# Altium PCB PCB-NW0101 Rev.B.PcbDoc (part 1 of 3)
Units mil, origin at the board's own origin, x right, y up, seen from the top; angles counter-clockwise.
Board outline 787.4 x 1377.95 mil, 6 copper layers (Top, GND, Inner3, Inner4, PWR, Bottom), stack 29.136 mil thick; 118 components, 126 nets, 559 pads, 474 vias.
Unrouted connection lines stored in the file: 214.
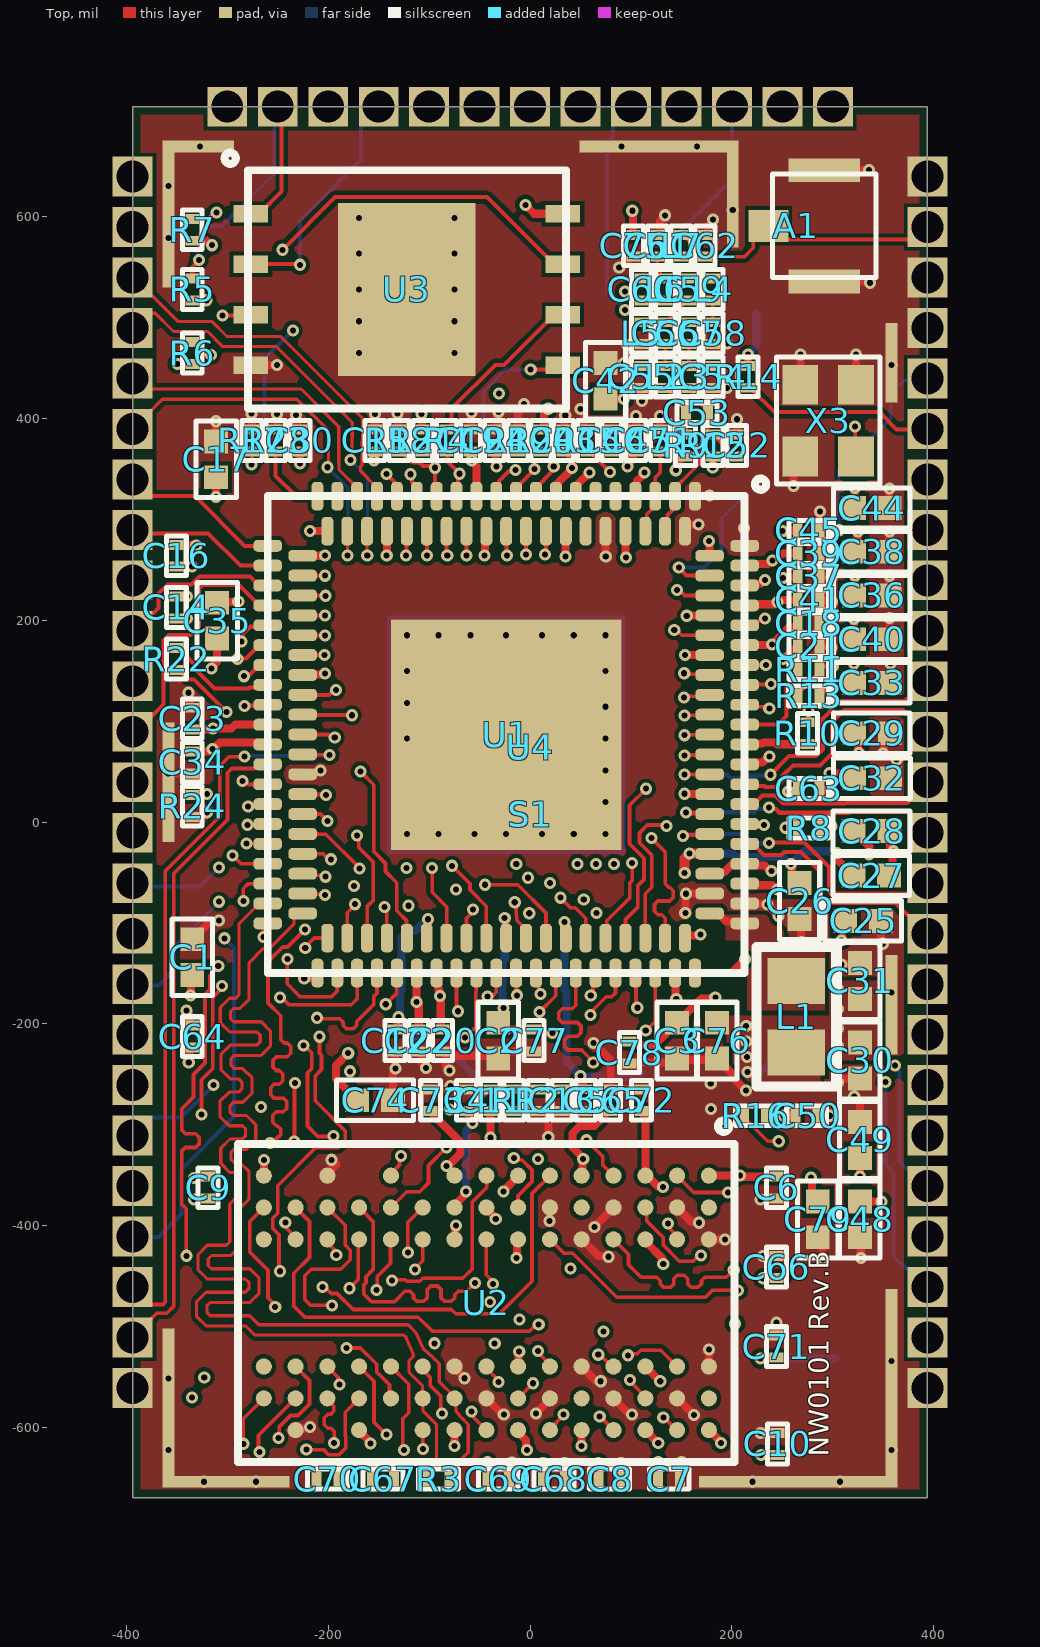
[diagram p0: Top view]
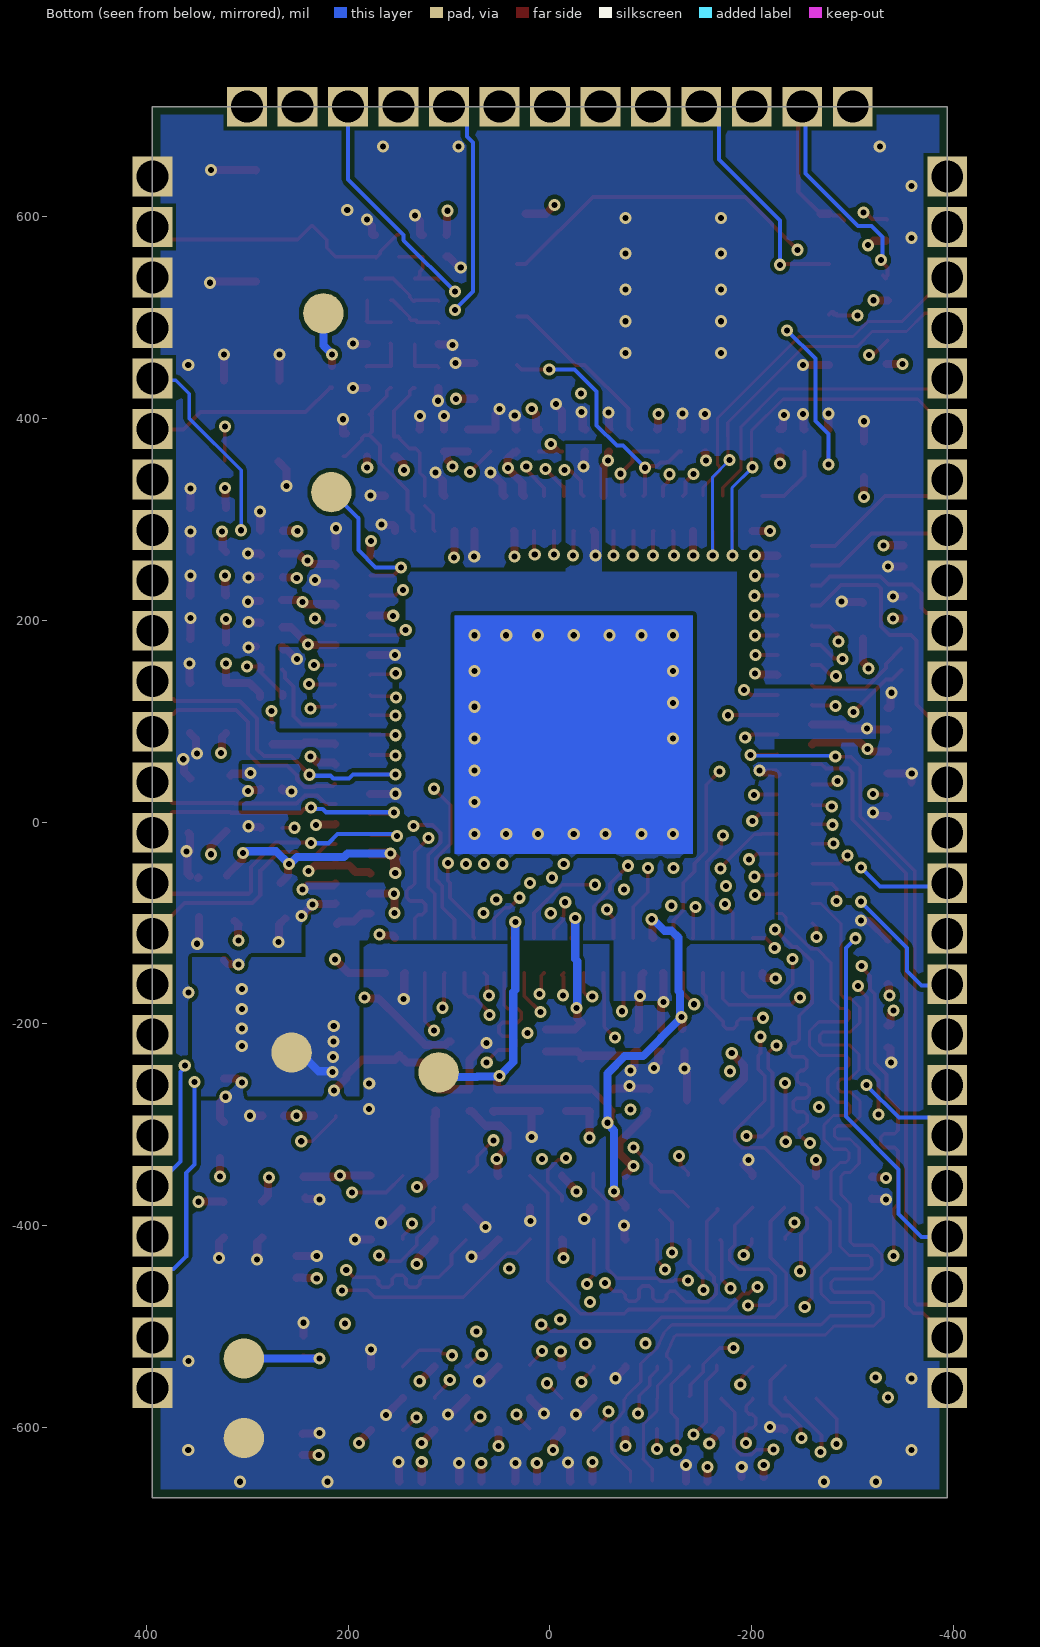
[diagram p1: Bottom view, seen from below]
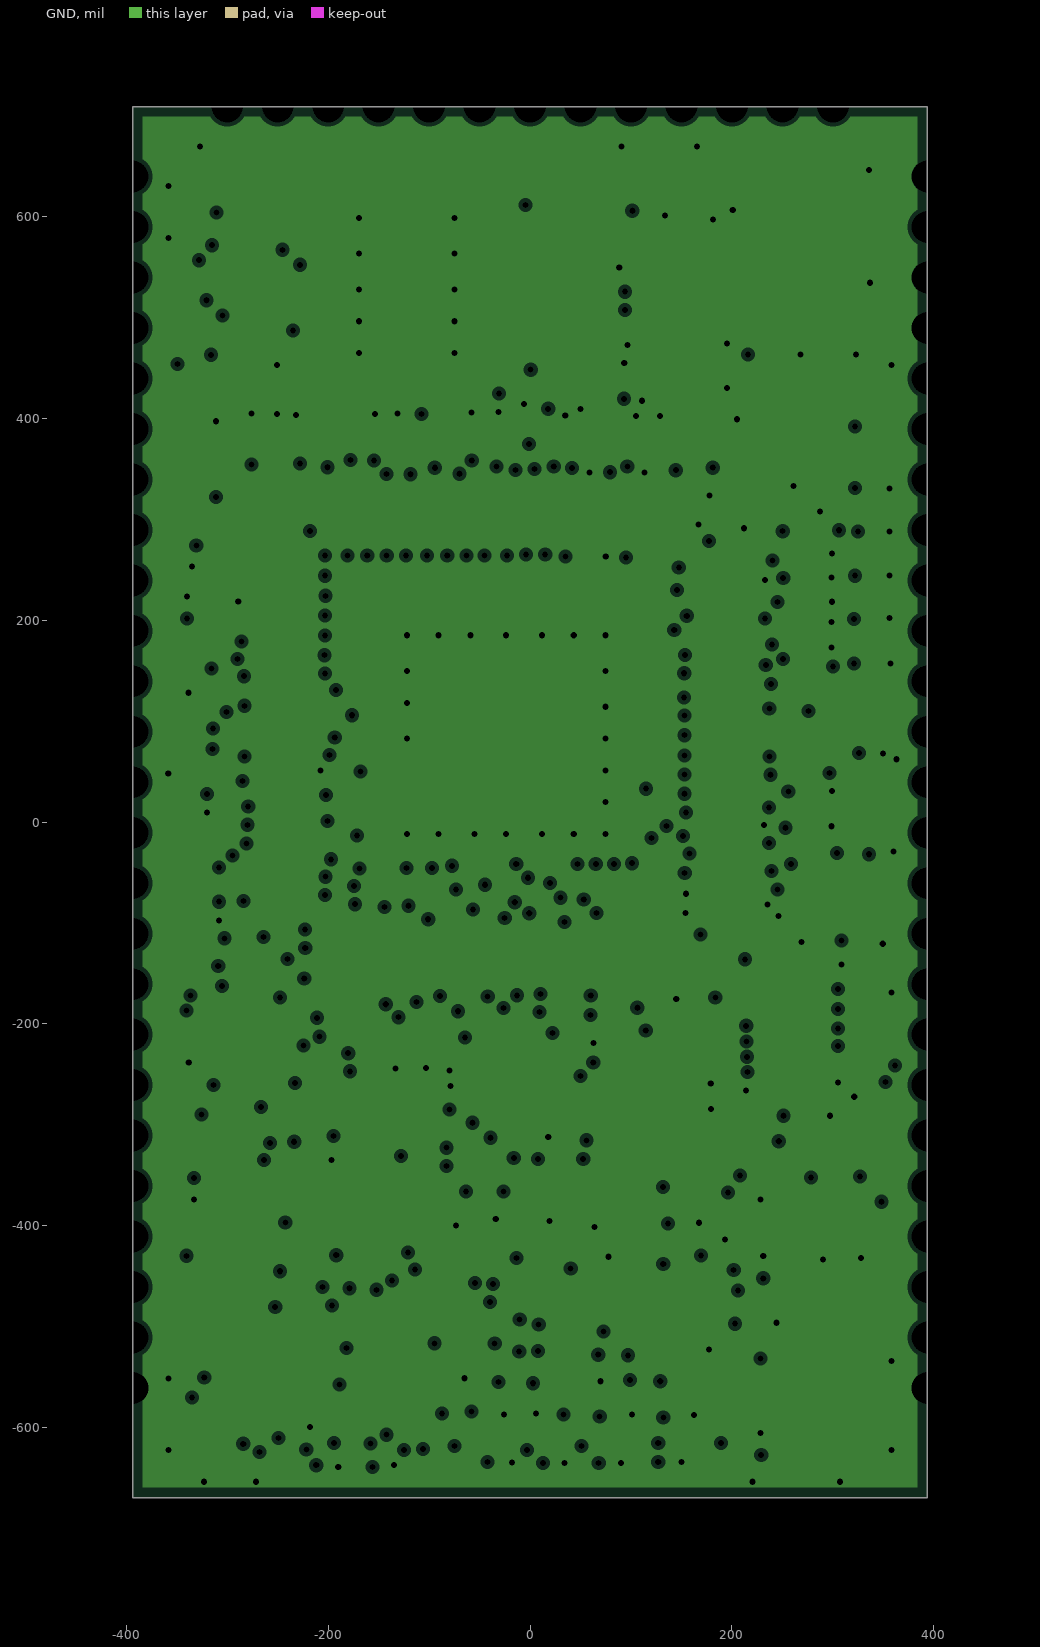
[diagram p2: GND, clearances drawn from the general rule]
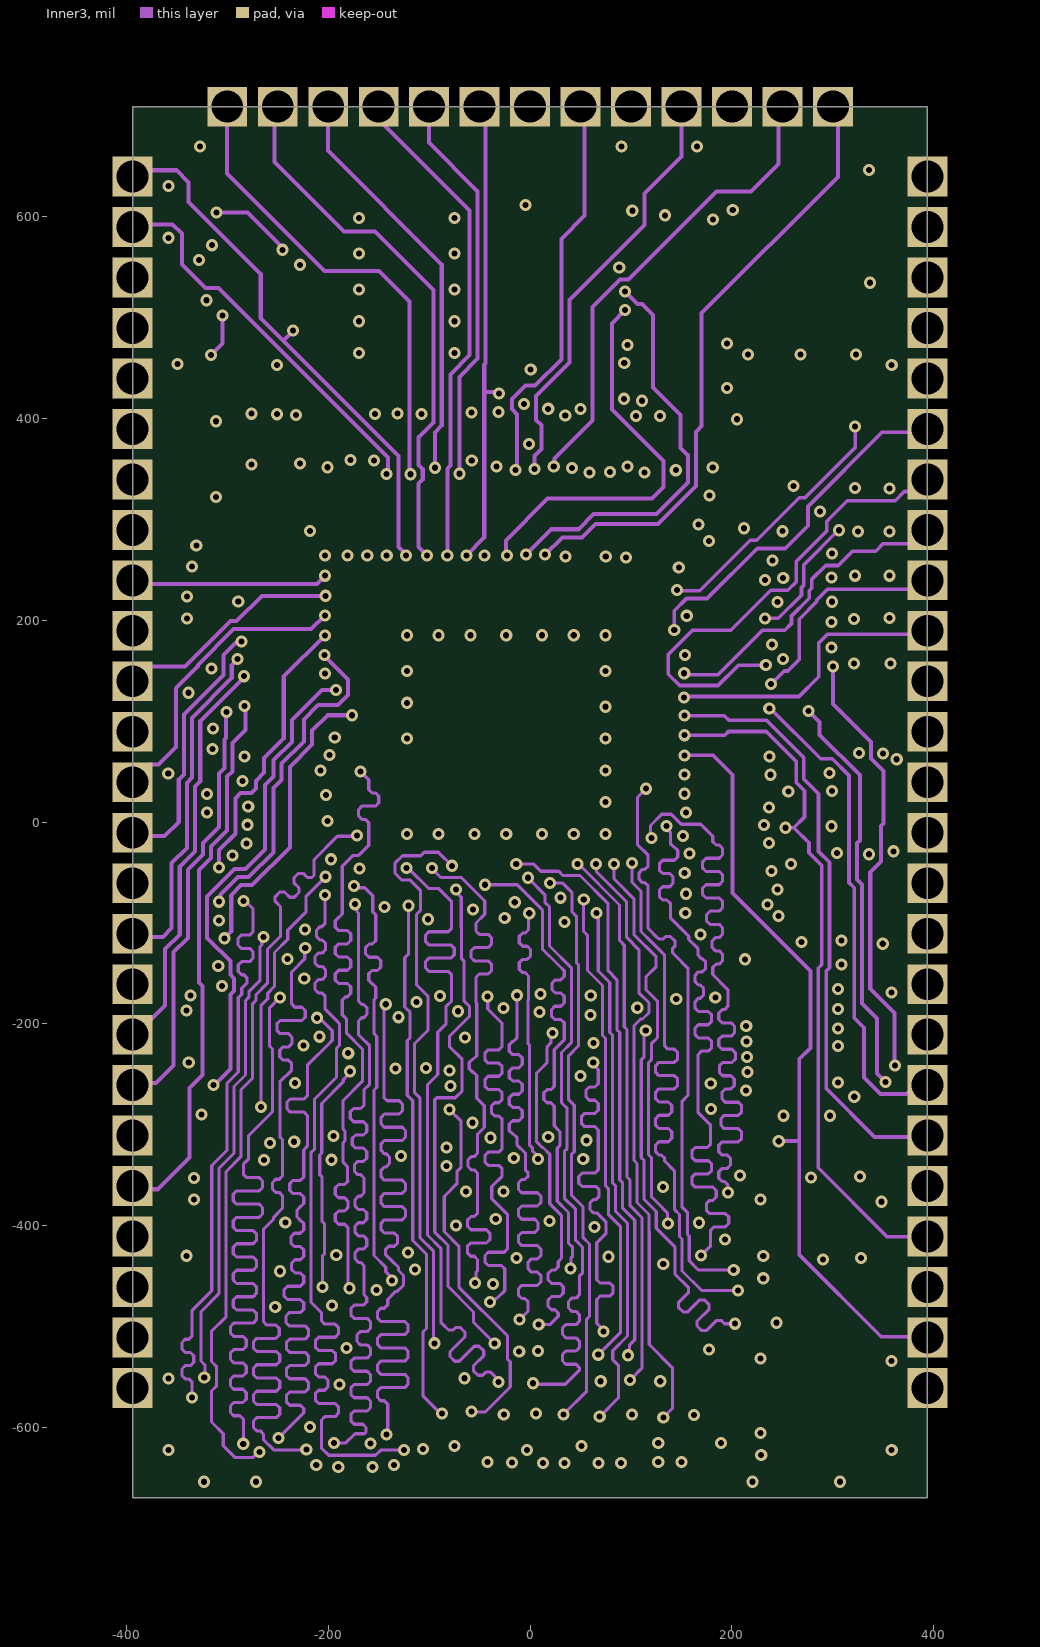
[diagram p3: Inner3]
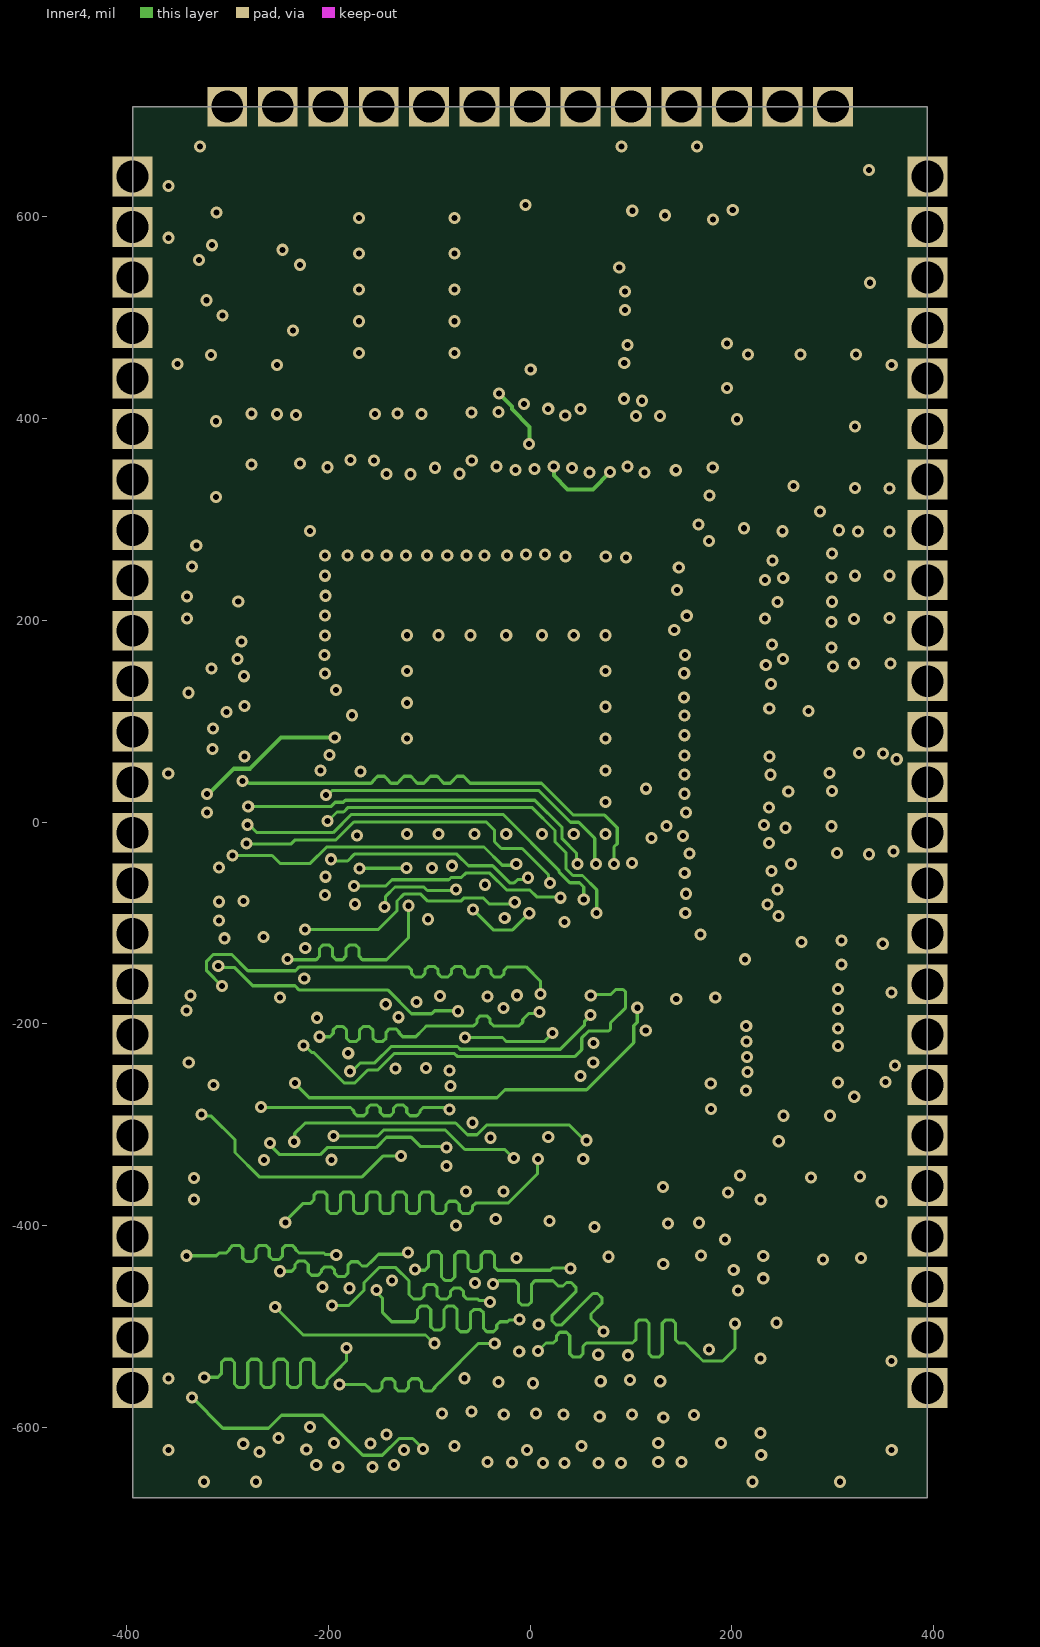
[diagram p4: Inner4]
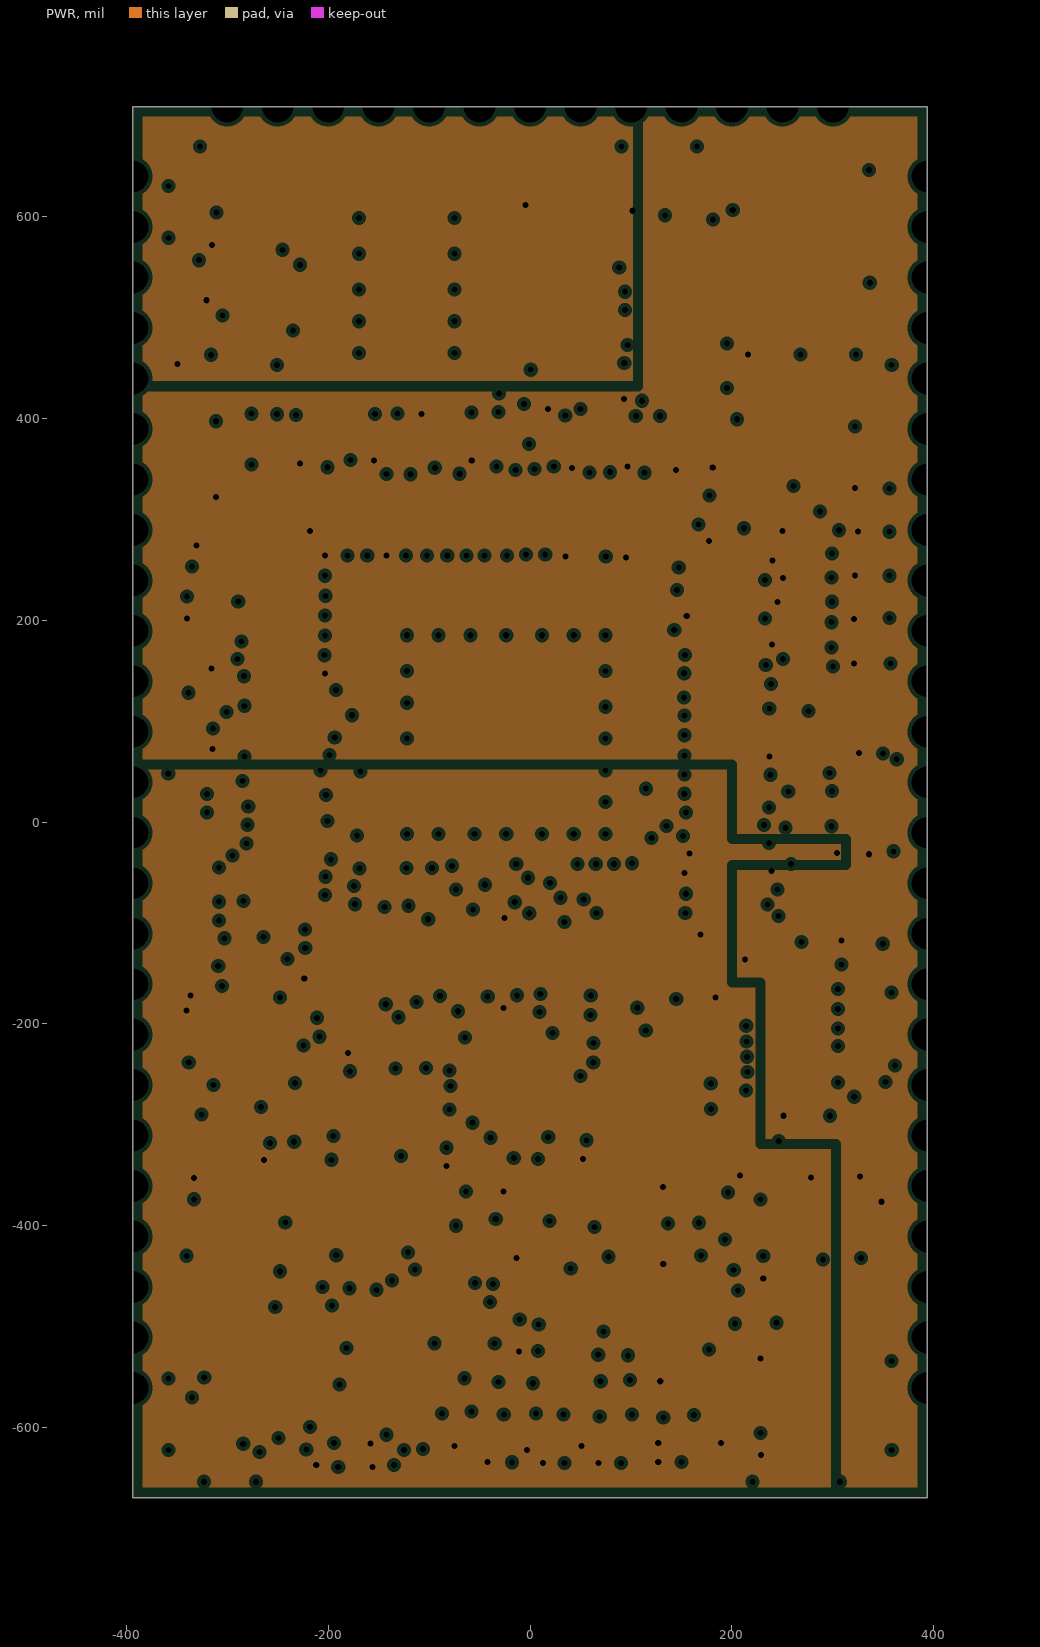
[diagram p5: PWR, clearances drawn from the general rule]
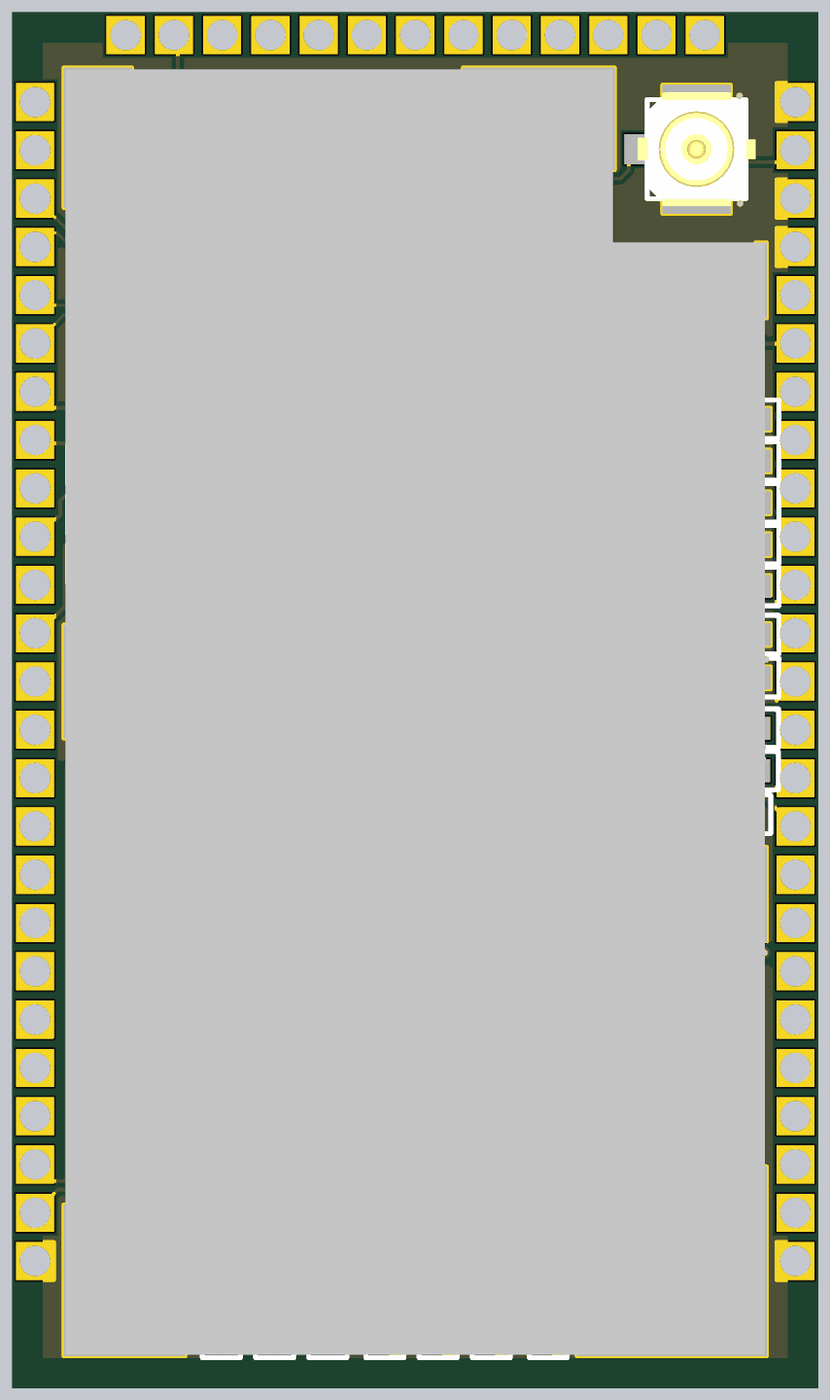
[diagram p8: 3D render of the assembled board from above, using the file's embedded part models]

## Layer stack, top to bottom
Solder Mask Top: solder mask 0.4, Solder Resist, Dk 3.5
Top: signal copper 1.35
Dielectric 1: dielectric 2.362, FR-4, Dk 4.3
GND: plane copper 1.378, net GND
Dielectric2: dielectric 3.1, FR-4, Dk 4.3
Inner3: signal copper 1.378
Dielectric3: dielectric 10, FR-4, Dk 4.3
Inner4: signal copper 1.378
Dielectric4: dielectric 3.1, FR-4, Dk 4.3
PWR: plane copper 1.378, net (Multiple Nets)
Dielectric5: dielectric 2.362, FR-4, Dk 4.3
Bottom: signal copper 1.35
Solder Mask Bottom: solder mask 0.4, Solder Resist, Dk 3.5

## Board outline
-393.7,708.66 393.7,708.66 393.7,-669.29 -393.7,-669.29

## Design rules (kind name [scope] priority, off if disabled: settings)
BoardOutlineClearance [All] p1: gap=8 ignorepadtopadclearanceinfootprint=FALSE except(0: THPad-OutlineEdge THPad-CavityEdge THPad-CutoutEdge; 6: Track-OutlineEdge Track-CavityEdge Track-CutoutEdge)
Clearance "Clearance - Default - DEFAULT - Net" [All] p1: gap=4 ignorepadtopadclearanceinfootprint=FALSE except(6: Via-Via)
ComponentClearance [All] p1: gap=0 collisioncheckmode=3 verticalgap=0 showdistances=FALSE
DiffPairsRouting "DiffPairsRouting - DiffPair - DDRCLK" [InDifferentialPair('DDRCLK')] p1: maxlimit=7 minlimit=5 mostfreqgap=5 toplayer_mingap=7 toplayer_prefgap=7 toplayer_minwidth=3.12 toplayer_maxwidth=3.12 toplayer_prefwidth=3.12 impedanceprofiledriven=TRUE impedanceprofileid={2A60CAE8-979D-4617-9CAD-F7D18D3C7651} impedanceprofilevalue=100.000000 maxuncoupledlength=500
DiffPairsRouting "DiffPairsRouting - DiffPair - ETH_R" [InDifferentialPair('ETH_R') or InDifferentialPair('ETH_T')] p2: maxlimit=7 minlimit=5 mostfreqgap=7 toplayer_mingap=7 toplayer_minwidth=3.12 toplayer_maxwidth=3.12 toplayer_prefwidth=3.12 bottomlayer_mingap=7 bottomlayer_minwidth=3.12 bottomlayer_maxwidth=3.12 bottomlayer_prefwidth=3.12 impedanceprofiledriven=TRUE impedanceprofileid={F7A5DDC0-C5B1-46B8-8866-6746753CC466} impedanceprofilevalue=100.000000 maxuncoupledlength=500
DiffPairsRouting "DiffPairsRouting - DiffPair - USB_D" [InDifferentialPair('USB')] p3: maxlimit=5 minlimit=4.5 mostfreqgap=5 toplayer_mingap=5 toplayer_minwidth=3.6 toplayer_maxwidth=3.6 toplayer_prefwidth=3.6 impedanceprofiledriven=TRUE impedanceprofileid={C5FCCC38-FD2C-4A72-8F5C-545B132D70D5} impedanceprofilevalue=90.000000 maxuncoupledlength=500
DiffPairsRouting "DiffPairsRouting - DiffPair - PCIE" [InDifferentialPair('PCIE_R') or InDifferentialPair('PCIE_T') or InDifferentialPair('PCIE_CLK')] p4: maxlimit=5 minlimit=4 mostfreqgap=5 toplayer_mingap=5 toplayer_minwidth=4.09 toplayer_maxwidth=4.09 toplayer_prefwidth=4.09 bottomlayer_mingap=5 bottomlayer_minwidth=4.08 bottomlayer_maxwidth=4.08 bottomlayer_prefwidth=4.08 impedanceprofiledriven=TRUE impedanceprofileid={683894AC-71DA-4711-AA13-E03A25D4E6CD} impedanceprofilevalue=85.000000 maxuncoupledlength=500
FabricationTestpoint [All] p1: side=3 testpointundercomponent=TRUE minsize=40 maxsize=40 preferedsize=40 minholesize=0 maxholesize=0 preferedholesize=0 testpointgrid=1 allowsidetop=TRUE allowsidebottom=TRUE usegrid=FALSE gridtolerance=0.01
HoleSize [All] p1: absolutevalues=TRUE maxlimit=100 minlimit=0 maxpercent=80.000 minpercent=20.000
HoleToHoleClearance "HoleToHoleClearance - Default - DEFAULT" [All] p1: gap=4 allowstackedmicrovias=TRUE
MatchedLengths [InNetClass('DDR')] p1: tolerance=100 checknetsindiffpair=FALSE checkdiffpairvsdiffpair=TRUE checkxsignals=TRUE checkothers=TRUE
MinimumSolderMaskSliver MinimumSolderMaskSliver_1 [OnLayer('Bottom') vs OnLayer('Bottom')] p1: minsoldermaskwidth=3
MinimumSolderMaskSliver [OnLayer('Top') vs OnLayer('Top')] p2: minsoldermaskwidth=3
PlaneClearance [All] p1: clearance=4
PlaneConnect "Default PlaneConnect" [All] p1: planeconnectstyle=Direct reliefexpansion=20 reliefentries=4 reliefconductorwidth=15 reliefairgap=10
PolygonConnect "PolygonConnect - Default Pad" [All] p1: connectstyle=Direct reliefconductorwidth=15 reliefentries=4 polygonreliefangle="45 Angle" airgapwidth=10
ReturnPath "ReturnPath - DDRCLK" [InNetClass('DDRCLK')] p1: impedanceprofileid={2A60CAE8-979D-4617-9CAD-F7D18D3C7651} _gaplimit=0
ReturnPath ReturnPath-DDR [All] p2: impedanceprofileid={722ABB41-7FFB-403E-9E2B-BB6A49F0BD66} _gaplimit=0
ReturnPath "ReturnPath - RF" [All] p3: impedanceprofileid={3401BA53-1A97-405B-B9A4-8C0F8181F371} _gaplimit=0
ReturnPath "ReturnPath - USB" [All] p4: impedanceprofileid={C5FCCC38-FD2C-4A72-8F5C-545B132D70D5} _gaplimit=0
ReturnPath "ReturnPath - PCIE" [All] p5: impedanceprofileid={683894AC-71DA-4711-AA13-E03A25D4E6CD} _gaplimit=0
ReturnPath "ReturnPath - Eth" [InNetClass('ETH')] p6: impedanceprofileid={F7A5DDC0-C5B1-46B8-8866-6746753CC466} _gaplimit=5
RoutingLayers "RoutingLayers - USB" [InNetClass('USB')] p1: top layer_v5=TRUE mid layer 1_v5=FALSE mid layer 2_v5=FALSE bottom layer_v5=TRUE
RoutingLayers "RoutingLayers - PCIE" [InNetClass('PCIE')] p2: top layer_v5=TRUE mid layer 1_v5=FALSE mid layer 2_v5=FALSE bottom layer_v5=TRUE
RoutingLayers "RoutingLayers - DDRCLK" [InNetClass('DDRCLK')] p3: top layer_v5=TRUE mid layer 1_v5=TRUE mid layer 2_v5=TRUE bottom layer_v5=TRUE
RoutingLayers "RoutingLayers - NetClass - RF" [InNetClass('RF')] p4: top layer_v5=TRUE mid layer 1_v5=FALSE mid layer 2_v5=FALSE bottom layer_v5=FALSE
RoutingLayers "RoutingLayers - NetClass - DDR" [InNetClass('DDR')] p5: top layer_v5=TRUE mid layer 1_v5=TRUE mid layer 2_v5=TRUE bottom layer_v5=TRUE
RoutingLayers "RoutingLayers - ETH" [InNetClass('ETH')] p6: top layer_v5=TRUE mid layer 1_v5=FALSE mid layer 2_v5=FALSE bottom layer_v5=TRUE
RoutingLayers "RoutingLayers - NetClass - Power" [InNetClass('Power')] p7: top layer_v5=TRUE mid layer 1_v5=FALSE mid layer 2_v5=FALSE bottom layer_v5=TRUE
RoutingLayers "RoutingLayers - Net - GND" [InNet('GND')] p8: top layer_v5=TRUE mid layer 1_v5=FALSE mid layer 2_v5=FALSE bottom layer_v5=FALSE
RoutingLayers "RoutingLayers - Default" [All] p9: top layer_v5=TRUE mid layer 1_v5=TRUE mid layer 2_v5=TRUE bottom layer_v5=TRUE
RoutingPriority "RoutingPriority - PCIE" [InNetClass('PCIE')] p1: routingpriority=5
RoutingPriority "RoutingPriority - USB" [InNetClass('USB')] p2: routingpriority=5
RoutingPriority "RoutingPriority - ETH" [InNetClass('ETH')] p3: routingpriority=5
RoutingPriority "RoutingPriority - DDRCLK" [InNetClass('DDRCLK')] p4: routingpriority=5
RoutingPriority "RoutingPriority - DDR" [InNetClass('DDR')] p5: routingpriority=3
RoutingPriority "RoutingPriority - Default" [All] p6: routingpriority=0
RoutingVias "RoutingVias - Default" [All] p1: holewidth=4 width=10 viastyle="Through Hole" minholewidth=0 minwidth=10 maxholewidth=4 maxwidth=40
SolderMaskExpansion "SolderMaskExpansion from CAM settings" [All] p1: expansion=2 istentingtop=FALSE
Width "Width - NetClass -RF" [InNetClass('RF')] p1: maxlimit=6 minlimit=3 preferedwidth=10 toplayer_prefwidth=3.63 impedanceprofiledriven=TRUE impedanceprofileid={3401BA53-1A97-405B-B9A4-8C0F8181F371} impedanceprofilevalue=50.000000 minimp=50.000000 maximp=50.000000 favimp=50.000000
Width "Width - NetClass - DDR" [InNetClass('DDR')] p2: maxlimit=6 minlimit=3 preferedwidth=3.63 toplayer_minwidth=3.63 toplayer_maxwidth=3.63 midlayer1_minwidth=3.1 midlayer1_maxwidth=3.1 midlayer1_prefwidth=3.1 midlayer2_minwidth=3.09 midlayer2_maxwidth=3.09 midlayer2_prefwidth=3.09 impedanceprofiledriven=TRUE impedanceprofileid={722ABB41-7FFB-403E-9E2B-BB6A49F0BD66} impedanceprofilevalue=50.000000 minimp=50.000000 maximp=50.000000 favimp=50.000000
Width "Width - Net - GND" [InNet('GND')] p3: maxlimit=10 minlimit=4 preferedwidth=8 minimp=50.000000 maximp=50.000000 favimp=50.000000
Width "Width - NetClass - Power" [InNetClass('Power')] p4: maxlimit=10 minlimit=4 preferedwidth=8 minimp=50.000000 maximp=50.000000 favimp=50.000000
Width "Width - DEFAULT" [All] p5: maxlimit=10 minlimit=3 preferedwidth=4 minimp=50.000000 maximp=50.000000 favimp=50.000000
20 further rules are at their usual default settings.

## Classes and differential pairs
net class DDRCLK: DDR_CLK_N DDR_CLK_P
net class ETH: ETH_RN ETH_RP ETH_TN ETH_TP
net class PCIE: PCIE_CKN PCIE_CKP PCIE_RXN PCIE_RXP PCIE_TXN PCIE_TXP
net class USB: USB_D+ USB_D-
net class DDR: DDR_A0 DDR_A1 DDR_A2 DDR_A3 DDR_A4 DDR_A5 DDR_A6 DDR_A7 DDR_A8 DDR_A9 DDR_A10 DDR_A11 DDR_A12 DDR_A13 DDR_BA0 DDR_BA1 DDR_BA2 DDR_CAS DDR_CKE DDR_CS DDR_D0 DDR_D1 DDR_D2 DDR_D3 DDR_D4 DDR_D5 DDR_D6 DDR_D7 DDR_D8 DDR_D9 DDR_D10 DDR_D11 DDR_D12 DDR_D13 DDR_D14 DDR_D15 DDR_LDM DDR_LDQS DDR_ODT DDR_RAS DDR_UDM DDR_UDQS DDR_WE
net class RF: ANT_OUT RF_DIFF+ RF_DIFF- RF_HP+ RF_HP- RF_LP RF_LP+ RF_LP- RF_NOTCH
net class Power: 1V2 1V8 3V3 DDR_1V8 DDR_VREF LXBK VDD_FLASH
component class WIFI: A1 C36 C37 C38 C39 C40 C41 C42 C43 C44 C45 C46 C47 C48 C49 C50 C51 C52 C53 C54 C55 C56 C57 C58 C59 C60 C61 C62 L2 L3 L4 L5 L6 L7 R9 R12 X3
component class USB_PCIE: C32 C33 C34 C35 C63 R16 R24
component class POWER: C18 C19 C20 C21 C22 C23 C24 C25 C26 C27 C28 C29 C30 C31 C76 L1 U1
component class MISC: C75 R4 R5 R6 R7 R8 R10 R11 R13 R14 R15 R17 R18 R19 R20 R21 U3
component class MEMORY: C1 C2 C3 C4 C5 C6 C7 C8 C9 C10 C11 C12 C13 C64 C65 C66 C67 C68 C69 C70 C71 C72 C73 C74 C77 C78 C79 R1 R2 R3 U2
component class INTERFACE: S1 U4
component class ETH_JTAG_SD: C14 C15 C16 C17 C80 R22 R23
differential pair PCIE_CLK: +PCIE_CKP -PCIE_CKN
differential pair PCIE_R: +PCIE_RXP -PCIE_RXN
differential pair DDRCLK: +DDR_CLK_P -DDR_CLK_N
differential pair ETH_R: +ETH_RP -ETH_RN
differential pair ETH_T: +ETH_TP -ETH_TN

## Components (designator, comment, footprint, x,y, rotation, side; value= is the part's Value field where it differs from the comment)
A1 "CONMHF1-SMD-G-T" CONMHF1-SMD-G-T 291.34,590.55 r0 top locked
C1 "CAP0402-105-6.3V-X7R" C0402 -334.65,-133.86 r90 top value="1uF 16V X7R"
C2 "CAP0402-105-6.3V-X7R" C0402 -31.5,-216.54 r270 top value="1uF 16V X7R"
C3 "CAP0402-105-6.3V-X7R" C0402 145.67,-216.54 r270 top value="1uF 16V X7R"
C4 "CAP0201-104-16V-X7R" C0201 -62.99,-275.59 r90 top value="0.1uF 16V X7R"
C5 "CAP0201-104-16V-X7R" C0201 55.12,-275.59 r270 top value="0.1uF 16V X7R"
C6 "CAP0201-104-16V-X7R" C0201 244.09,-362.2 r270 top value="0.1uF 16V X7R"
C7 "CAP0201-104-16V-X7R" C0201 137.8,-650.9 r0 top value="0.1uF 16V X7R"
C8 "CAP0201-104-16V-X7R" C0201 78.74,-650.9 r0 top value="0.1uF 16V X7R"
C9 "CAP0201-104-16V-X7R" C0201 -318.9,-362.2 r270 top value="0.1uF 16V X7R"
C10 "CAP0201-104-16V-X7R" C0201 245.08,-616.14 r90 top value="0.1uF 16V X7R"
C11 "CAP0201-104-16V-X7R" C0201 -39.37,-275.59 r90 top value="0.1uF 16V X7R"
C12 "CAP0201-104-16V-X7R" C0201 -133.86,-216.54 r270 top value="0.1uF 16V X7R"
C13 "CAP0201-104-16V-X7R" C0201 31.5,-275.59 r270 top value="0.1uF 16V X7R"
C14 "CAP0201-104-16V-X7R" C0201 -350.39,212.6 r90 top value="0.1uF 16V X7R"
C15 "CAP0201-104-16V-X7R" C0201 -153.54,377.95 r90 top value="0.1uF 16V X7R"
C16 "CAP0201-104-16V-X7R" C0201 -350.39,263.78 r270 top value="0.1uF 16V X7R"
C17 "CAP0402-105-6.3V-X7R" C0402 -311,359.28 r90 top value="1uF 16V X7R"
C18 "CAP0201-104-16V-X7R" C0201 276,197 r0 top value="0.1uF 16V X7R"
C19 "CAP0201-104-16V-X7R" C0201 -59.06,377.95 r90 top value="0.1uF 16V X7R"
C20 "CAP0201-104-16V-X7R" C0201 -86.61,-216.54 r270 top value="0.1uF 16V X7R"
C21 "CAP0201-104-16V-X7R" C0201 276,174 r0 top value="0.1uF 16V X7R"
C22 "CAP0201-104-16V-X7R" C0201 -110.24,-216.54 r270 top value="0.1uF 16V X7R"
C23 "CAP0201-104-16V-X7R" C0201 -334.65,102.36 r90 top value="0.1uF 16V X7R"
C24 "CAP0201-104-16V-X7R" C0201 -35.43,377.95 r90 top value="0.1uF 16V X7R"
C25 "CAP0402-225-6.3V-X7R" C0402 330,-98 r0 top value="2.2uF 10V X7R"
C26 "CAP0402-475-10V-X5R" C0402 267,-78.28 r270 top value="4.7uF 10V X5R"
C27 "CAP0402-225-6.3V-X7R" C0402 338,-53 r0 top value="2.2uF 10V X7R"
C28 "CAP0402-105-6.3V-X7R" C0402 338.28,-9 r0 top value="1uF 16V X7R"
C29 "CAP0402-105-6.3V-X7R" C0402 338.58,87.99 r0 top value="1uF 16V X7R"
C30 "CAP0402-106-6.3V-X5R" C0402 326.77,-236.22 r270 top value="10uF 6.3V X5R"
C31 "CAP0402-106-6.3V-X5R" C0402 326.77,-157.48 r90 top value="10uF 6.3V X5R"
C32 "CAP0402-475-10V-X5R" C0402 338.72,43.31 r0 top value="4.7uF 10V X5R"
C33 "CAP0402-475-10V-X5R" C0402 338.58,137.8 r0 top value="4.7uF 10V X5R"
C34 "CAP0201-104-16V-X7R" C0201 -334.65,59.06 r270 top value="0.1uF 16V X7R"
C35 "CAP0402-475-10V-X5R" C0402 -310,199.48 r90 top value="4.7uF 10V X5R"
C36 "CAP0402-105-6.3V-X7R" C0402 338.58,224.41 r0 top value="1uF 16V X7R"
C37 "CAP0201-101-16V-X7R" C0201 276,243 r0 top value="100pF 16V X7R"
C38 "CAP0402-105-6.3V-X7R" C0402 338.58,267.72 r0 top value="1uF 16V X7R"
C39 "CAP0201-101-16V-X7R" C0201 276,266 r0 top value="100pF 16V X7R"
C40 "CAP0402-225-6.3V-X7R" C0402 338.58,181.1 r0 top value="2.2uF 10V X7R"
C41 "CAP0201-101-16V-X7R" C0201 276,220 r0 top value="100pF 16V X7R"
C42 "CAP0402-105-6.3V-X7R" C0402 74.8,437.01 r90 top value="1uF 16V X7R"
C43 "CAP0201-101-16V-X7R" C0201 33,378 r90 top value="100pF 16V X7R"
C44 "CAP0402-105-6.3V-X7R" C0402 338.58,311.02 r0 top value="1uF 16V X7R"
C45 "CAP0201-101-16V-X7R" C0201 276,289 r0 top value="100pF 16V X7R"
C46 "CAP0201-101-16V-X7R" C0201 81,378 r90 top value="100pF 16V X7R"
C47 "CAP0201-101-16V-X7R" C0201 105,378 r90 top value="100pF 16V X7R"
C48 "CAP0402-105-6.3V-X7R" C0402 326.77,-393.7 r270 top value="1uF 16V X7R"
C49 "CAP0402-475-10V-X5R" C0402 326.77,-314.96 r90 top value="4.7uF 10V X5R"
C50 "CAP0201-100-25V-NP0" C0201 274,-291 r0 top value="10pF 25V NP0"
C51 "CAP0201-020-25V-NP0" C0201 129,378 r270 top value="2pF 25V NP0"
C52 "CAP0201-020-25V-NP0" C0201 204.72,373 r90 top value="2pF 25V NP0"
C53 "CAP0201-NOP" C0201_NOP 165.35,405.51 r0 top value=NOP
C54 "CAP0201-NOP" C0201_NOP 181.1,440.94 r270 top value=NOP
C55 "CAP0201-NOP" C0201_NOP 110.24,440.94 r270 top value=NOP
C56 "CAP0201-100-25V-NP0" C0201 133.86,484.25 r270 top value="10pF 25V NP0"
C57 "CAP0201-100-25V-NP0" C0201 157.48,484.25 r270 top value="10pF 25V NP0"
C58 "CAP0201-1R2-25V-NP0" C0201 181.1,484.25 r270 top value="1.2PF 25V NP0"
C59 "CAP0201-1R2-25V-NP0" C0201 157.48,527.56 r270 top value="1.2PF 25V NP0"
C60 "CAP0201-090-100V-NP0" C0201 110.24,527.56 r270 top value="9pF 25V NP0"
C61 "CAP0201-020-25V-NP0" C0201 125.98,570.87 r90 top value="2pF 25V NP0"
C62 "CAP0201-020-25V-NP0" C0201 173.23,570.87 r90 top value="2pF 25V NP0"
C63 "CAP0201-104-16V-X7R" C0201 276,33 r180 top value="0.1uF 16V X7R"
C64 "CAP0201-152-16V-X7R" C0201 -334.65,-212.6 r270 top value="1.5nF 16V X7R"
C65 "CAP0201-104-16V-X7R" C0201 79.81,-275.59 r90 top value="0.1uF 16V X7R"
C66 "CAP0201-104-16V-X7R" C0201 244.09,-440.94 r90 top value="0.1uF 16V X7R"
C67 "CAP0201-104-16V-X7R" C0201 -145.67,-650.9 r0 top value="0.1uF 16V X7R"
C68 "CAP0201-104-16V-X7R" C0201 23.62,-650.9 r0 top value="0.1uF 16V X7R"
C69 "CAP0201-104-16V-X7R" C0201 -31.5,-650.9 r0 top value="0.1uF 16V X7R"
C70 "CAP0201-104-16V-X7R" C0201 -200.79,-650.9 r0 top value="0.1uF 16V X7R"
C71 "CAP0201-104-16V-X7R" C0201 244.09,-519.68 r90 top value="0.1uF 16V X7R"
C72 "CAP0201-104-16V-X7R" C0201 110.24,-275.59 r90 top value="0.1uF 16V X7R"
C73 "CAP0201-104-16V-X7R" C0201 -98.43,-275.59 r90 top value="0.1uF 16V X7R"
C74 "CAP0402-225-6.3V-X7R" C0402 -153.54,-275.59 r0 top value="2.2uF 10V X7R"
C75 "CAP0201-104-16V-X7R" C0201 102.36,570.87 r270 top value="0.1uF 16V X7R"
C76 "CAP0402-475-10V-X5R" C0402 185.04,-216.54 r270 top value="4.7uF 10V X5R"
C77 "CAP0201-152-16V-X7R" C0201 3.94,-216.54 r270 top value="1.5nF 16V X7R"
C78 "CAP0201-152-16V-X7R" C0201 98.43,-228.35 r270 top value="1.5nF 16V X7R"
C79 "CAP0402-475-10V-X5R" C0402 285,-393.7 r270 top value="4.7uF 10V X5R"
C80 "CAP0201-104-16V-X7R" C0201 -228,377.95 r90 top value="0.1uF 16V X7R"
L1 "IND0805_2.2U_1.9A" L0805 263.78,-192.91 r270 top value="2.2uH 1.9A"
L2 "IND0201_1.5N_600MA" L0201 133.86,440.94 r90 top value=1.5nH
L3 "IND0201_1.5N_600MA" L0201 157.48,440.94 r90 top value=1.5nH
L4 "IND0201_2.5N_500MA" L0201 181.1,527.56 r90 top value=2.5nH
L5 "IND0201_2.5N_500MA" L0201 110.24,484.25 r270 top value=2.5nH
L6 "IND0201_1.8N_200MA" L0201 133.86,527.56 r90 top value="1.8nH 200mA"
L7 "IND0201_1.5N_600MA" L0201 149.61,570.87 r90 top value=1.5nH
R1 "RES0201-1K00" R0201 -15.75,-275.59 r270 top value="1K00 1% 1/20W"
R2 "RES0201-1K00" R0201 7.87,-275.59 r90 top value="1K00 1% 1/20W"
R3 "RES0201-100R" R0201 -90.55,-650.9 r0 top value="100R 1% 1/20W"
R4 "RES0201-22R0" R0201 -82.68,377.95 r90 top value="22R0 1% 1/20W"
R5 "RES0201-4K70" R0201 -334.65,527.56 r270 top value="4K70 1% 1/20W"
R6 "RES0201-10K0" R0201 -334.65,464.57 r270 top value="10K0 1% 1/20W"
R7 "RES0201-10K0" R0201 -334.65,586.61 r270 top value="10K0 1% 1/20W"
R8 "RES0201-4K70" R0201 276,-6 r180 top value="4K70 1% 1/20W"
R9 "RES0201-50R0" R0201 154,372.99 r270 top value="50R 1% 0.075W"
R10 "RES0201-22R0" R0201 275,88 r270 top value="22R0 1% 1/20W"
R11 "RES0201-22R0" R0201 276,151 r0 top value="22R0 1% 1/20W"
R12 "RES0201-50R0" R0201 181.1,373 r270 top value="50R 1% 0.075W"
R13 "RES0201-10K0" R0201 275.89,125 r0 top value="10K0 1% 1/20W"
R14 "RES0201-4K70" R0201 216,441 r90 top value="4K70 1% 1/20W"
R15 "RES0201-4K70" R0201 57,378 r270 top value="4K70 1% 1/20W"
R16 "RES0201-10K0" R0201 223,-291 r0 top value="10K0 1% 1/20W"
R17 "RES0201-4K70" R0201 -275.59,377.95 r270 top value="4K70 1% 1/20W"
R18 "RES0201-4K70" R0201 -129.92,377.95 r270 top value="4K70 1% 1/20W"
R19 "RES0201-4K70" R0201 -11.81,377.95 r270 top value="4K70 1% 1/20W"
R20 "RES0201-NOP" R0201_NOP 11,378 r270 top value=NOP
R21 "RES0201-4K70" R0201 -106.3,377.95 r270 top value="4K70 1% 1/20W"
R22 "RES0201-22R0" R0201 -350.39,161.42 r90 top value="22R0 1% 1/20W"
R23 "RES0201-24K3" R0201 -251.97,377.95 r90 top value="24K3 1% 1/20W"
R24 "RES0201-5K10" R0201 -334.65,15.75 r270 top value="5K10 1% 1/20W"
S1 "O2S-SHIELD" O2S-SHIELD 3.94,-3.94 r0 top locked
U1 "MT7688AN" DR-QFN-128 -23.62,86.61 r270 top locked
U2 "W9751G6NB-25" TWBGA-84_8X12P5_ISI -43.31,-476.38 r270 top locked
U3 "W25Q128JVEIQ" WIN_E-8_WIN -122.05,527.56 r0 top locked
U4 "OMEGA2S-PCB" OMEGA2S+PCB 0,239.37 r0 top locked
X3 "R2520-40.000-12-F-1010-TR-NS1" R2520-40.000-12-F-1010-TR-NS1 295.28,397.64 r270 top value=40Mhz

## Footprints (in the part's own frame and the unit in brackets; to place one, negate y for a bottom-side part, rotate by r counter-clockwise, add the part's x,y. Pads: shape width x height; smd on the part's side, far side on the other; paste and mask are expansions set on the pad)
C0201 [mm]
  rect 0.25x0.35 smd: 1(-0.275,0) 2(0.275,0)
  silkscreen extent -0.5,-0.25 0.5,0.25, body extent -0.3,-0.15 0.3,0.15, height 0.35
C0201_NOP [mm]
  rect 0.25x0.35 smd: 1(-0.275,0) 2(0.275,0)
  silkscreen extent -0.5,-0.25 0.5,0.25
C0402 [mm]
  rrect0% 0.6x0.6 smd: 1(-0.45,0) 2(0.45,0)
  silkscreen extent -0.97,-0.51 0.97,0.51, body extent -0.5,-0.25 0.5,0.25, height 0.65
CONMHF1-SMD-G-T [mm]
  rect 1x0.8 smd: 1(-1.4,0)
  rect 1.8x0.6 smd: 2(0,-1.4) 3(0,1.4)
  silkscreen extent -1.3,-1.3 1.3,1.3, body extent -1.55,-1.5 1.55,1.5, height 1.31
DR-QFN-128 [mm]
  rrect70% 0.72x0.3 smd: 1(-6,4.75) 2(-5.12,4.5) 3(-6,4.25) 4(-5.12,4) 5(-6,3.75) 6(-5.12,3.5) 7(-6,3.25) 8(-5.12,3) 9(-6,2.75) 10(-5.12,2.5) 11(-6,2.25) 12(-5.12,2) 13(-6,1.75) 14(-5.12,1.5) 15(-6,1.25) 16(-5.12,1) 17(-6,0.75) 18(-5.12,0.5) 19(-6,0.25) 20(-5.12,0) 21(-6,-0.25) 22(-5.12,-0.5) 23(-6,-0.75) 24(-5.12,-1) 25(-6,-1.25) 26(-5.12,-1.5) 27(-6,-1.75) 28(-5.12,-2) 29(-6,-2.25) 30(-5.12,-2.5) 31(-6,-2.75) 32(-5.12,-3) 33(-6,-3.25) 34(-5.12,-3.5) 35(-6,-3.75) 36(-5.12,-4) 37(-6,-4.25) 38(-5.12,-4.5) 39(-6,-4.75)
  rrect70% 0.3x0.72 smd: 40(-4.75,-6) 41(-4.5,-5.12) 42(-4.25,-6) 43(-4,-5.12) 44(-3.75,-6) 45(-3.5,-5.12) 46(-3.25,-6) 47(-3,-5.12) 48(-2.75,-6) 49(-2.5,-5.12) 50(-2.25,-6) 51(-2,-5.12) 52(-1.75,-6) 53(-1.5,-5.12) 54(-1.25,-6) 55(-1,-5.12) 56(-0.75,-6) 57(-0.5,-5.12) 58(-0.25,-6) 59(0,-5.12) 60(0.25,-6) 61(0.5,-5.12) 62(0.75,-6) 63(1,-5.12) 64(1.25,-6) 65(1.5,-5.12) 66(1.75,-6) 67(2,-5.12) 68(2.25,-6) 69(2.5,-5.12) 70(2.75,-6) 71(3,-5.12) 72(3.25,-6) 73(3.5,-5.12) 74(3.75,-6) 75(4,-5.12) 76(4.25,-6) 77(4.5,-5.12) 78(4.75,-6) 118(4.75,6) 119(4.5,5.12) 120(4.25,6) 121(4,5.12) 122(3.75,6) 123(3.5,5.12) 124(3.25,6) 125(3,5.12) 126(2.75,6) 127(2.5,5.12) 128(2.25,6) 129(2,5.12) 130(1.75,6) 131(1.5,5.12) 132(1.25,6) 133(1,5.12) 134(0.75,6) 135(0.5,5.12) 136(0.25,6) 137(0,5.12) 138(-0.25,6) 139(-0.5,5.12) 140(-0.75,6) 141(-1,5.12) 142(-1.25,6) 143(-1.5,5.12) 144(-1.75,6) 145(-2,5.12) 146(-2.25,6) 147(-2.5,5.12) 148(-2.75,6) 149(-3,5.12) 150(-3.25,6) 151(-3.5,5.12) 152(-3.75,6) 153(-4,5.12) 154(-4.25,6) 155(-4.5,5.12) 156(-4.75,6)
  rrect70% 0.72x0.3 smd rot 179.99: 79(6,-4.75) 80(5.12,-4.5) 81(6,-4.25) 82(5.12,-4) 83(6,-3.75) 84(5.12,-3.5) 85(6,-3.25) 86(5.12,-3) 87(6,-2.75) 88(5.12,-2.5) 89(6,-2.25) 90(5.12,-2) 91(6,-1.75) 92(5.12,-1.5) 93(6,-1.25) 94(5.12,-1) 95(6,-0.75) 96(5.12,-0.5) 97(6,-0.25) 98(5.12,0) 99(6,0.25) 100(5.12,0.5) 101(6,0.75) 102(5.12,1) 103(6,1.25) 104(5.12,1.5) 105(6,1.75) 106(5.12,2) 107(6,2.25) 108(5.12,2.5) 109(6,2.75) 110(5.12,3) 111(6,3.25) 112(5.12,3.5) 113(6,3.75) 114(5.12,4) 115(6,4.25) 116(5.12,4.5) 117(6,4.75)
  rrect0% 5.8x5.8 smd: 157(0,0)
  silkscreen extent -6.44,-6 6,6.54
L0201 [mm]
  rect 0.25x0.35 smd: 1(-0.275,0) 2(0.275,0)
  silkscreen extent -0.5,-0.25 0.5,0.25, body extent -0.3,-0.15 0.3,0.15, height 0.23
L0805 [mm]
  rect 1.15x1.45 smd: 1(-0.9,0) 2(0.9,0)
  silkscreen extent -1.75,-1 1.75,1, body extent -1,-0.63 1,0.63, height 0.61
O2S-SHIELD [mm]
  rect 0.3x3.7 smd: 1(-9.2,15.4)
  rect 0.3x3 smd: 2(-9.2,1.1)
  rect 0.3x4 smd: 3(-9.2,-14.65)
  rect 3.2x0.3 smd: 4(-7.75,-16.5)
  rect 5x0.3 smd: 5(6.65,-16.5)
  rect 0.3x5 smd: 6(9,-14.15)
  rect 0.3x2.5 smd: 7(9,-4.5)
  rect 0.3x2 smd: 8(9,11.65)
  rect 1.8x0.3 smd: 9(-8.45,17.1)
  rect 4x0.3 smd: 10(3.15,17.1)
  rect 0.3x2.7 smd: 11(5,15.9)
  body extent -9.3,-16.6 9.1,17.2, height 2
OMEGA2S+PCB [mm]
  rect 1x1 hole 0.8: A1(7.62,11.92) A2(6.35,11.92) A3(5.08,11.92) A4(3.81,11.92) A5(2.54,11.92) A6(1.27,11.92) A7(0,11.92) A8(-1.27,11.92) A9(-2.54,11.92) A10(-3.81,11.92) A11(-5.08,11.92) A12(-6.35,11.92) A13(-7.62,11.92) B1(-10,10.16) B2(-10,8.89) B3(-10,7.62) B4(-10,6.35) B5(-10,5.08) B6(-10,3.81) B7(-10,2.54) B8(-10,1.27) B9(-10,0) B10(-10,-1.27) B11(-10,-2.54) B12(-10,-3.81) B13(-10,-5.08) B14(-10,-6.35) B15(-10,-7.62) B16(-10,-8.89) B17(-10,-10.16) B18(-10,-11.43) B19(-10,-12.7) B20(-10,-13.97) B21(-10,-15.24) B22(-10,-16.51) B23(-10,-17.78) B24(-10,-19.05) B25(-10,-20.32) C1(10,10.16) C2(10,8.89) C3(10,7.62) C4(10,6.35) C5(10,5.08) C6(10,3.81) C7(10,2.54) C8(10,1.27) C9(10,0) C10(10,-1.27) C11(10,-2.54) C12(10,-3.81) C13(10,-5.08) C14(10,-6.35) C15(10,-7.62) C16(10,-8.89) C17(10,-10.16) C18(10,-11.43) C19(10,-12.7) C20(10,-13.97) C21(10,-15.24) C22(10,-16.51) C23(10,-17.78) C24(10,-19.05) C25(10,-20.32)
R0201 [mm]
  rect 0.25x0.35 smd: 1(-0.275,0) 2(0.275,0)
  silkscreen extent -0.5,-0.25 0.5,0.25, body extent -0.3,-0.15 0.3,0.15, height 0.23
R0201_NOP [mm]
  rect 0.25x0.35 smd: 1(-0.275,0) 2(0.275,0)
  silkscreen extent -0.5,-0.25 0.5,0.25
R2520-40.000-12-F-1010-TR-NS1 [mm]
  rect 1x0.9 smd: 1(-0.9,-0.7) 2(0.9,-0.7) 3(0.9,0.7) 4(-0.9,0.7)
  silkscreen extent -1.6,-1.3 1.6,1.3, body extent -1.25,-1 1.25,1, height 0.65
TWBGA-84_8X12P5_ISI [mil]
  round 16 smd: A1(-125.98,220.47) A2(-94.49,220.47) A3(-62.99,220.47) A7(62.99,220.47) A8(94.49,220.47) A9(125.98,220.47) B1(-125.98,188.98) B2(-94.49,188.98) B3(-62.99,188.98) B7(62.99,188.98) B8(94.49,188.98) B9(125.98,188.98) C1(-125.98,157.48) C2(-94.49,157.48) C3(-62.99,157.48) C7(62.99,157.48) C8(94.49,157.48) C9(125.98,157.48) D1(-125.98,125.98) D2(-94.49,125.98) D3(-62.99,125.98) D7(62.99,125.98) D8(94.49,125.98) D9(125.98,125.98) E1(-125.98,94.49) E2(-94.49,94.49) E3(-62.99,94.49) E7(62.99,94.49) E8(94.49,94.49) E9(125.98,94.49) F1(-125.98,62.99) F2(-94.49,62.99) F3(-62.99,62.99) F7(62.99,62.99) F8(94.49,62.99) F9(125.98,62.99) G1(-125.98,31.5) G2(-94.49,31.5) G3(-62.99,31.5) G7(62.99,31.5) G8(94.49,31.5) G9(125.98,31.5) H1(-125.98,0) H2(-94.49,0) H3(-62.99,0) H7(62.99,0) H8(94.49,0) H9(125.98,0) J1(-125.98,-31.5) J2(-94.49,-31.5) J3(-62.99,-31.5) J7(62.99,-31.5) J8(94.49,-31.5) J9(125.98,-31.5) K2(-94.49,-62.99) K3(-62.99,-62.99) K7(62.99,-62.99) K8(94.49,-62.99) K9(125.98,-62.99) L1(-125.98,-94.49) L2(-94.49,-94.49) L3(-62.99,-94.49) L7(62.99,-94.49) L8(94.49,-94.49) M2(-94.49,-125.98) M3(-62.99,-125.98) M7(62.99,-125.98) M8(94.49,-125.98) M9(125.98,-125.98) N1(-125.98,-157.48) N2(-94.49,-157.48) N3(-62.99,-157.48) N7(62.99,-157.48) N8(94.49,-157.48) P2(-94.49,-188.98) P3(-62.99,-188.98) P7(62.99,-188.98) P8(94.49,-188.98) P9(125.98,-188.98) R1(-125.98,-220.47) R2(-94.49,-220.47) R3(-62.99,-220.47) R7(62.99,-220.47) R8(94.49,-220.47)
  silkscreen extent -181,-246 157,246, body extent -159,-248 159,248, height 47
WIN_E-8_WIN [mil]
  rect 34x17 smd: 1(-154.5,75) 2(-154.5,25) 3(-154.5,-25) 4(-154.5,-75) 5(154.5,-75) 6(154.5,-25) 7(154.5,25) 8(154.5,75)
  rect 136x171 smd: 9(0,0)
  silkscreen extent -181,-118 157,136, body extent -159,-120 159,120, height 31

## Part data
A1: "CONN UMC JACK STR SMD", Manufacturer="Linx Technologies Inc.", Part Number=CONMHF1-SMD-G-T, PCB DECAL=CONMHF1-SMD-G-T, Prefered Vender=Digikey, Revision=A, Type=Connector
C1 C2 C3 C17 C28 C29 C36 C38 C42 C44 C48: "CAP CER 1UF 6.3V X7R 0402", Aligni Value=1u, Manufacturer="Murata Electronics", Part Number=GRM155R70J105KA12D, Geometry.Height=0.33mm, PCB DECAL=RC0402, Prefered Vender=Digikey, Revision=A, Type=Capacitor
C4 C5 C6 C7 C8 C9 C10 C11 C12 C13 C14 C15 C16 C18 C19 C20 C21 C22 C23 C24 C34 C63 C65 C66 C67 C68 C69 C70 C71 C72 C73 C75 C80: "CAP CER 0.1UF 16V X7R 0201", Aligni Value=0.1u, Manufacturer="Murata Electronics", Part Number=GRM033Z71C104KE14D, Geometry.Height=0.33mm, PCB DECAL=RC0201, Prefered Vender=Digikey, Revision=A, Type=Capacitor
C25 C27 C40 C74: "CAP CER 2.2UF 10V X7R 0402", Aligni Value=2.2u, Manufacturer="Murata Electronics", Part Number=GRM155Z71A225KE01D, Geometry.Height=0.33mm, PCB DECAL=RC0402, Prefered Vender=Digikey, Revision=A, Type=Capacitor
C26 C32 C33 C35 C49 C76 C79: "CAP CER 4.7UF 10V X5R 0402", Aligni Value=4.7u, Manufacturer="Samsung Electro-Mechanics", Part Number=CL05A475MP5NRNC, Geometry.Height=0.33mm, PCB DECAL=RC0402, Prefered Vender=Digikey, Revision=A, Type=Capacitor
C30 C31: "CAP CER 10UF 6.3V X5R 0402", Aligni Value=10u, Manufacturer="Murata Electronics", Part Number=GRM155R60J106ME05J, Geometry.Height=0.33mm, PCB DECAL=C0402, Prefered Vender=Digikey, Revision=A, Type=Capacitor
C37 C39 C41 C43 C45 C46 C47: "CAP CER 100PF 16V X7R 0201", Aligni Value=100p, Manufacturer="Walsin Technology Corporation", Part Number=0201B101K160CT, Geometry.Height=0.33mm, PCB DECAL=RC0201, Prefered Vender=Digikey, Revision=A, Type=Capacitor
C50 C56 C57: "CAP CER 10PF 25V C0G/NP0 0201", Aligni Value=10p, Manufacturer="Walsin Technology Corporation", Part Number=0201N100J250CT, Geometry.Height=0.33mm, PCB DECAL=RC0201, Prefered Vender=Digikey, Revision=A, Type=Capacitor
C51 C52 C61 C62: "CAP CER 2PF 25V C0G/NP0 0201", Aligni Value=2p, Manufacturer="Samsung Electro-Mechanics", Part Number=CL03C020BA3GNNC, Geometry.Height=0.33mm, PCB DECAL=RC0201, Prefered Vender=Digikey, Revision=A, Type=Capacitor
C53 C54 C55: "NOP", Aligni Value=12p, Geometry.Height=0mm, Manufacturer=NOP, Part Number=NOP, PCB DECAL=RC0201, Prefered Vender=NOP, Revision=NOP, Type=Capacitor
C58 C59: "CAP CER 1.2PF 25V C0G/NP0 0201", Aligni Value=1.2P, Manufacturer="Murata Electronics", Part Number=GRM0335C1E1R2WA01D, Geometry.Height=0.33mm, PCB DECAL=RC0201, Prefered Vender=Digikey, Revision=A, Type=Capacitor
C60: "CAP CER 9PF 25V C0G 0201", Aligni Value=9p, Manufacturer="TDK Corporation", Part Number=CGA1A2C0G1E090D030BA, Geometry.Height=0.33mm, PCB DECAL=RC0201, Prefered Vender=Digikey, Revision=A, Type=Capacitor
C64 C77 C78: "CAP CER 1500PF 16V X7R 0201", Aligni Value=1.5n, Manufacturer="TDK Corporation", Part Number=CGA1A2X7R1C152K030BA, Geometry.Height=0.33mm, PCB DECAL=RC0201, Prefered Vender=Digikey, Revision=A, Type=Capacitor
L1: "POWER CHOKE MOLDED 2.2UH 1.9A", Aligni Value=2.2u, Manufacturer="Walsin Technology Corporation", Part Number=WLPH201610M2R2PP, Geometry.Height=1.5mm, PCB DECAL=RC0805, Prefered Vender=Digikey, Revision=A, Type=Inductor
L2 L3 L7: "INDUCTOR FIXED 1.5NH 0201", Aligni Value=1.5n, Manufacturer="Walsin Technology Corporation", Part Number=WLCM0603TGB1N5TB, Geometry.Height=1.5mm, PCB DECAL=RC0201, Prefered Vender=Digikey, Revision=A, Type=Inductor
L4 L5: "FIXED IND 2.5NH 500MA 200MOHM SM", Aligni Value=2.5n, Manufacturer="Murata Electronics", Part Number=LQP03TN2N5B02D, Geometry.Height=1.5mm, PCB DECAL=RC0201, Prefered Vender=Digikey, Revision=A, Type=Inductor
L6: "FIXED IND 1.8NH 200MA 550MOHM SM", Aligni Value=1.8n, Manufacturer="TE Connectivity Passive Product", Part Number=1-2176075-8, Geometry.Height=1.5mm, PCB DECAL=RC0201, Prefered Vender=Digikey, Revision=A, Type=Inductor
R1 R2: "RES 1K OHM 1% 1/20W 0201", Aligni Value=1k, Manufacturer="Stackpole Electronics Inc", Part Number=RMCF0201FT1K00, Geometry.Height=0.6mm, PCB DECAL=RC0201, Prefered Vender=Digikey, Revision=A, Type=Resistor
R3: "RES 100 OHM 1% 1/20W 0201", Aligni Value=100, Manufacturer=Yageo, Part Number=RC0201FR-07100RL, Geometry.Height=0.5mm, PCB DECAL=RC0201, Prefered Vender=Digikey, Revision=A, Type=Resistor
R4 R10 R11 R22: "RES 22 OHM 1% 1/20W 0201", Aligni Value=22, Manufacturer=Yageo, Part Number=RC0201FR-0722RL, Geometry.Height=0.5mm, PCB DECAL=RC0201, Prefered Vender=Digikey, Revision=A, Type=Resistor
R5 R8 R14 R15 R17 R18 R19 R21: "RES 4.7K OHM 1% 1/20W 0201", Aligni Value=4.7k, Manufacturer=Yageo, Part Number=RC0201FR-074K7L, Geometry.Height=0.5mm, PCB DECAL=RC0201, Prefered Vender=Digikey, Revision=A, Type=Resistor
R6 R7 R13 R16: "RES SMD 10K OHM 1% 1/20W 0201", Aligni Value=10k, Manufacturer=Yageo, Part Number=RC0201FR-0710KP, Geometry.Height=0.5mm, PCB DECAL=RC0201, Prefered Vender=Digikey, Revision=A, Type=Resistor
R9 R12: "RES 50 OHM 0.1% 0.075W 0201", Aligni Value=50, Manufacturer="Vishay Dale", Part Number=TNPW020150R0BEED, Geometry.Height=0.5mm, PCB DECAL=RC0201, Prefered Vender=Digikey, Revision=A, Type=Resistor
R20: "NOP", Aligni Value=NOP, Geometry.Height=0mm, Manufacturer=NOP, Part Number=NOP, PCB DECAL=RC0201, Prefered Vender=NOP, Revision=A, Type=Resistor
R23: "RES 24.3K OHM 1% 1/20W 0201", Aligni Value=24.3k, Manufacturer=YAGEO, Part Number=RC0201FR-0724K3L, Geometry.Height=0.6mm, PCB DECAL=RC0201, Prefered Vender=Digikey, Revision=A, Type=Resistor
R24: "RES SMD 5.1K OHM 1% 1/20W 0201", Aligni Value=5.1k, Manufacturer=YAGEO, Part Number=AC0201FR-075K1L, Geometry.Height=0.6mm, PCB DECAL=RC0201, Prefered Vender=Digikey, Revision=A, Type=Resistor
S1: "O2S SHIELD", Manufacturer="RYSE Inc.", Geometry.Height=0mm, Part Number=O2S-SHIELD, PCB DECAL=O2S-SHIELD, Prefered Vender=Digikey, Revision=A, Type="Electronic OEM Component"
U1: "580Mhz 32bits Networking Processor", Manufacturer="MediaTek Inc", Geometry.Height=0mm, Part Number=MT7688AN, PCB DECAL=DR-QFN-128, Type=IC
U2: "IC DRAM 512MBIT PARALLEL 84VFBGA", Manufacturer="Winbond Electronics", Part Number=W9751G6NB-25, PCB DECAL=TWBGA-84_8X12P5_ISI, Prefered Vender=Digikey, Type=IC
U3: "IC FLASH 128MBIT SPI/QUAD 8WSON", Manufacturer="Winbond Electronics", Part Number=W25Q128JVEIQ, PCB DECAL=WIN_E-8_WIN, Prefered Vender=Digikey, Type=IC
U4: "RX TXRX MODULE WIFI U.FL SMD", Manufacturer="Onion Corporation", Part Number=OM-O2S, Geometry.Height=0mm, PCB DECAL=OMEGA2S+PCB, Prefered Vender=Digikey, Revision=A, Type="Electronic OEM Component"
X3: "CRYSTAL 40.0000MHZ 12PF SMD", Aligni Value=40Meg, Manufacturer="Raltron Electronics", Geometry.Height=0.9mm, Part Number=R2520-40.000-12-F-1010-TR-NS1, PCB DECAL=R2520-40.000-12-F-1010-TR-NS1, Prefered Vender=Digikey, Revision=A, Type=Crystal

## Free pads (board coordinates)
  round 40 smd far side paste-30: 2(303.15,-610.24) 3(255.91,-228.35) 4(303.15,-531.5) 5(224.41,503.94) 6(110.24,-248.03) 7(216.54,326.77)

## Via types
v1: diameter 12/12/12/12 (per signal layer), hole 6, Top to Bottom, tented both sides, 474 vias

## Nets (pads, with @x,y where several pads share a name; then routed paths per layer and width w, separated by ;. In a path a pad name is that pad's centre, name@x,y a point inside that pad or via, vN(x,y) a via of type N, cw(c..) or ccw(c..) an arc to the next point about the centre after c; other vN are vias at no path point)
1V2: C20.1 C21.1 C22.1 C23.1 C24.1 C30.1 C31.1 C32.1 C63.2 C76.1 L1.2 pad.3 U1.22 U1.58 U1.89 U1.91 U1.122 U1.131 U1.145 | length 418.3
  Top w8: C23.1@-334.65,91.54 -316.04,91.54 -315.08,92.5 v1(-314,92.5) ; v1@-314.79,92.72 -314.56,92.5 -295.96,92.5 -292,96.46 U1.58@-259.84,96.46 ; v1(-112.6,-178.41) -112.4,-178.21 -112.4,-149.8 U1.89@-112.2,-149.6 ; v1@-112.2,-177.64 -110.24,-179.61 C22.1@-110.24,-204.79 ; U1.91@-92.52,-149.6 -90.7,-151.43 -90.7,-166.43 -89.97,-167.16 -89.97,-171.69 v1(-89.2,-172.46) ; v1@-87.95,-173.68 -88.44,-174.16 -88.44,-204.79 -87.21,-206.02 C20.1@-86.61,-206.02 ; v1(-45,264) -44.62,264.38 -44.62,286.88 U1.22@-43.31,288.19 ; C24.1@-34.76,367.13 -34.13,366.49 -34.13,352.92 v1(-33.36,352.16) ; v1(153,28) 153.22,27.78 177.73,27.78 U1.131@177.95,27.56 ; v1@154.53,164.37 155.51,165.36 U1.145@177.95,165.36 ; U1.122@212.6,-61.02 214.2,-62.63 239.9,-62.63 244.11,-66.83 v1(245.19,-66.83) ; v1(250.44,161.54) 251.52,161.54 261.09,171.11 264.25,171.11 265.17,172.03 C21.1@265.17,174 ; v1(255.83,30.29) 256.6,31.06 264.25,31.06 265.17,31.98 C63.2@265.17,33 ; v1(296.67,48.59) 297.44,47.83 314.84,47.83 C32.1@316.41,46.26
  Bottom w8: v1(215.34,-247.66) 216.1,-246.89 229.19,-246.89 247.74,-228.35 pad.3@255.91,-228.35
  other v1: 214.94,-232.6 305.24,-221.83 214.34,-217.34 305.24,-204.56 214.15,-201.89 305.24,-185.17 305.24,-165.3 153.54,165.35
1V8: C1.1 C2.1 C3.1 C6.1 C7.1 C8.1 C9.1 C10.1 C26.1 C27.1 C64.1 C65.1 C66.1 C67.1 C68.1 C69.1 C70.1 C71.1 C72.1 C73.1 C74.1 C77.1 C78.1 C79.1 pad.4 U1.79 U1.98 U1.116 U1.125 U2.A1 U2.A9 U2.C1 U2.C3 U2.C7 U2.C9 U2.E1 U2.E9 U2.G1 U2.G3 U2.G7 U2.G9 U2.J1 U2.J9 U2.M9 U2.R1 | length 1481.6
  Top w8: v1(-340.45,-186.54) -340.45,-187.62 -337.54,-190.54 -337.54,-200.85 -335.57,-200.85 C64.1@-334.65,-201.77 ; v1(-336.47,-172) -335.71,-171.23 -335.71,-161.5 C1.1@-334.65,-160.43 ; v1(-333.07,-352.75) -332.39,-352.06 -321.79,-352.06 -321.1,-351.38 C9.1@-318.9,-351.38 ; U2.R1@-263.75,-350.36 v1(-263.72,-334.79) ; v1(-223.68,-155.03) -222.92,-154.26 -212.53,-154.26 -210.63,-152.37 U1.79@-210.63,-149.6 ; C70.1@-211.81,-648.84 -211.71,-648.75 -211.71,-637.24 v1(-211.81,-637.14) ; v1@-180.18,-229.03 -192.29,-241.13 -192.29,-254.56 C74.1@-171.26,-275.59 ; U2.M9@-169.29,-602.36 -169.29,-603.37 -157.87,-614.79 v1(-157.87,-615.79) ; C67.1@-156.25,-653.3 -156.25,-639.14 v1(-156,-638.89) ; C73.1@-96.46,-286.42 -95.54,-287.34 -95.54,-290.19 -68.9,-316.82 -68.9,-328.42 -80.33,-339.86 -82.05,-339.86 -82.9,-340.7 -74.8,-348.8 U2.J1@-74.8,-350.39 ; v1(-75,-618) -74.9,-617.9 -74.9,-602.46 U2.J9@-74.8,-602.36 ; C69.1@-42.16,-653.38 -42.16,-634.16 v1(-42,-634) ; v1(-26.47,-184.4) -27.24,-185.17 -27.24,-193.89 -26.9,-194.22 C2.1@-31.5,-198.82 -24.61,-205.71 C77.1@3.94,-205.71 ; v1(-26.42,-365.91) -26.42,-365.46 -11.81,-350.85 U2.G1@-11.81,-350.39 ; v1(-25.09,-95.26) -24.35,-95.99 -24.35,-114.23 U1.98@-23.62,-114.96 ; v1(-13.49,-431.8) -12.72,-431.04 -12.72,-414.3 U2.G3@-11.81,-413.39 ; U2.G9@-11.81,-602.36 -11.81,-604.53 -3.89,-612.44 -3.89,-621.28 v1(-3.13,-622.04) ; U2.G7@-11.81,-539.37 -11.27,-538.83 -11.27,-525.17 v1(-10.73,-524.63) ; C68.1@12.9,-653.44 12.9,-635.1 v1(13,-635) ; v1(51,-618) 51.09,-617.91 51.09,-602.45 U2.E9@51.18,-602.36 ; U2.E1@51.18,-350.39 51.92,-349.65 51.92,-334.69 v1(52.66,-333.95) 52.66,-332.86 42.04,-322.24 42.04,-308.36 49.52,-300.87 63.79,-300.87 70.01,-294.65 70.01,-294.25 77.84,-286.42 C65.1@79.81,-286.42 ; C8.1@67.96,-653.5 v1(68,-635) v1(68,-635) ; C78.1@98.42,-217.52 100.39,-217.52 103.59,-220.71 123.77,-220.71 C3.1@145.67,-198.82 ; C72.1@113.13,-285.68 113.13,-290.98 114.17,-292.03 U2.C1@114.17,-350.39 116.34,-350.39 126.92,-360.98 130.93,-360.98 v1(131.7,-361.74) ; U2.C9@114.17,-602.36 114.27,-602.36 126.91,-615 v1(127,-615) ; U2.C7@114.17,-539.37 114.27,-539.37 128.9,-554 v1(129,-554) ; U2.C3@114.17,-413.39 114.17,-415.31 131.17,-432.31 131.17,-437.15 v1(131.93,-437.92) ; C7.1@126.98,-653.53 v1(127,-634) ; C3.1@147.64,-196.85 169.81,-174.68 182.74,-174.68 v1(183.51,-173.91) ; U1.116@153.54,-114.96 153.54,-114.27 155.44,-112.38 168.04,-112.38 v1(168.81,-111.61) ; U2.A9@177.16,-602.36 190,-615.2 v1@190,-616 ; U1.125@177.7,-31.25 U1.125@177.95,-31.49 ; U2.A1@178,-350 178.2,-350.2 207.8,-350.2 v1(208,-350) ; v1@208.67,-350.38 208.92,-350.38 209.92,-351.38 C6.1@244.09,-351.38 ; v1(228.35,-531.5) 228.73,-531.11 243.49,-531.11 C71.1@244.09,-530.51 ; v1(229,-627) C10.1@245.08,-626.97 ; v1(231,-452) 231.11,-451.89 244.57,-451.89 245.08,-451.38 250.68,-451.38 251.07,-451.77 ; v1(258.58,-41.74) 259.34,-42.5 259.34,-52.91 C26.1@267,-60.57 ; v1(278.36,-352.19) 279.12,-352.95 279.12,-370.11 C79.1@285,-375.98 ; v1(304.08,-30.76) 304.65,-31.34 304.65,-37.37 320.08,-52.8 C27.1@320.08,-53
  Top w10: v1(153.2,-50.53) 153.2,-36.42 157.81,-31.82 v1(157.81,-31.27) U1.125@177.68,-31.27
  Bottom w8: v1(-26.47,-184.4) -27.09,-183.78 -27.09,-137.9 -25.09,-135.9 v1(-25.09,-95.26) ; v1(157.81,-31.27) 200.52,-31.27 203.87,-34.63 250.39,-34.63 257.5,-41.74 v1(258.58,-41.74) 271.32,-29 299.49,-29 300.48,-29.99 303.31,-29.99 v1(304.08,-30.76) ; v1(228.35,-531.5) pad.4@303.15,-531.5
  other v1: 189,-615 -82.9,-340.62 -180.14,-229.03
3V3: C14.1 C15.1 C16.1 C17.1 C18.1 C19.1 C25.1 C28.1 C29.1 C33.1 C34.1 C35.1 C36.1 C37.1 C38.1 C39.1 C40.1 C41.1 C42.1 C43.1 C44.1 C45.1 C46.1 C47.1 C48.1 C49.1 C50.1 C80.1 pad.5 R9.2 R12.2 R13.2 R14.2 R16.2 R20.1 R21.1 U1.8 U1.14 U1.15 U1.23 U1.32 U1.38 U1.41 U1.53 U1.60 U1.117 U1.123 U1.124 U1.134 U1.146 U1.149 U1.150 U1.154 U1.155 U4.C17 U4.C18 | length 1290.9
  Top w8: C14.1@-350.39,201.77 v1(-339.81,201.78) ; C16.1@-350.39,274.61 -349.99,274.2 -331.03,274.2 v1(-330.62,273.79) ; C34.1@-334.65,69.88 -331.76,69.88 -318.24,69.89 -315.78,72.34 v1(-314.7,72.34) ; v1(-315.51,152.12) -315.51,153.14 -310,158.65 C35.1@-310,181.77 ; v1@-314.35,72.34 -313.62,72.34 -307.15,78.81 -276.9,78.81 -276.68,78.59 -261.66,78.59 U1.60@-259.84,76.77 ; v1(-311,322) C17.1@-311,341.57 ; v1(-228,355) -228.17,355.17 -228.17,366.2 -227.38,367 C80.1@-226.25,367 ; U1.53@-225.2,145.67 -224.53,146.33 -203.78,146.33 v1(-203.12,147) ; U1.41@-225.2,263.78 v1@-203.22,263.78 ; v1(-217.96,288.24) -217.91,288.19 U1.38@-200.79,288.19 ; v1(-154.62,357.97) -154.08,358.51 -154.08,366.2 C15.1@-153.37,366.2 ; v1(-142,264) -141.87,264.13 -141.87,288.06 U1.32@-141.73,288.19 ; v1(-107.47,404.15) -106.89,403.56 -106.89,389.37 R21.1@-106.3,388.78 ; C19.1@-58.65,367.13 -57.73,366.2 -57.73,357.01 -53.15,352.43 U1.23@-53.15,322.84 ; R20.1@11,388.83 12.97,388.83 13.89,389.75 13.89,404.15 18,408.26 v1(18,409.34) ; U1.15@25.59,322.84 27.41,324.66 27.41,335.71 41.43,349.73 v1(41.43,350.81) ; C43.1@33,367.17 33.92,366.25 35.89,366.25 42.11,360.03 v1@42.11,352.85 ; v1(35,263) 35.22,263.22 35.22,287.97 U1.14@35.43,288.19 ; C42.1@74.8,419.29 v1(93.09,419.25) ; C46.1@81,367.17 C47.1@103.03,367.17 ; U1.8@94.49,288.19 94.49,261.51 v1@95,261 ; v1(96.35,352.29) 96.35,353.38 102.11,359.13 102.11,366.25 C47.1@103.03,367.17 ; C47.1@105,367.17 C47.1@103.03,367.17 ; v1(144.38,348.5) 145.15,349.26 145.15,355.28 152.03,362.17 R9.2@154,362.17 ; v1(155.25,204.29) 155.47,204.51 177.74,204.51 U1.149@177.95,204.73 ; U1.117@163.39,-149.6 199.4,-149.6 v1(213,-136) ; v1(177.34,278.24) 177.64,277.93 177.64,264.09 U1.155@177.95,263.78 ; U1.123@177.95,-51.18 179.77,-49.36 192.64,-49.36 198.84,-43.16 210.78,-43.16 U1.124@212.6,-41.34 214.42,-43.16 232.57,-43.16 238.03,-48.63 v1(239.12,-48.63) ; v1(181,351) 181.05,351.05 181.05,362.12 R12.2@181.1,362.17 ; U1.134@212.6,57.09 214.42,58.91 230.32,58.91 236.2,64.79 v1(237.17,64.79) ; U1.146@212.6,175.2 212.94,175.54 239.21,175.54 v1(239.55,175.87) ; U1.150@212.6,214.57 213.78,215.75 242.05,215.75 245.54,219.24 v1@245.54,219.65 ; U1.154@212.6,253.94 214.42,255.76 235.84,255.76 239.24,259.16 v1(240.32,259.16) ; R14.2@216,451.83 v1(216,463) ; R16.2@233.83,-291 v1@249,-291 ; v1@239.8,175.54 239.8,176.13 256.59,192.91 C18.1@264.76,192.91 ; v1@240.44,256.9 249.54,266 C39.1@265.17,266 ; v1@245.54,220 C41.1@265.17,220 ; v1(250.27,288.09) 250.72,288.55 264.25,288.55 C45.1@264.25,288.8 ; v1(250.78,241.72) 251.42,242.36 264.25,242.36 264.4,242.51 C37.1@264.4,242.73 ; v1(251,-291) C50.1@263.17,-291 ; R13.2@287,124 287,127.25 297.54,137.8 C33.1@320.87,137.79 320.93,137.86 320.93,156.93 v1(321,157) ; v1(308.41,-117.27) 309.18,-116.51 309.18,-102 308.73,-101.55 C25.1@312.28,-98 ; C28.1@320.57,-9 335.99,-24.43 335.99,-31.83 v1(335.89,-31.94) ; C40.1@320.87,178 C40.1@320.87,181.1 320.93,181.17 320.93,200.93 v1(321,201) ; C36.1@320.87,227 C36.1@320.87,224.41 321.62,225.16 321.62,243.62 v1(322,244) ; C38.1@320.87,267.72 324.11,270.96 324.11,287.14 v1(324.88,287.91) ; C44.1@320.87,311.02 320.93,311.09 320.93,316 321.31,316.38 321.31,330.61 v1(321.75,331.05) ; C29.1@321,88 324.93,84.07 324.93,69.27 v1(325.69,68.51) ; C48.1@323.47,-376.62 324,-376.08 348.17,-376.08 v1(348.27,-376.18) ; C49.1@326.93,-332.84 326.89,-332.89 326.89,-350.89 v1(327,-351)
  Bottom w8: v1(216,463) 216,463.54 224.4,471.94 pad.5@224.41,503.94
  other v1: 245.18,217.8 95,262 -203,264 -57.73,358.21
ANT_OUT: A1.1 C62.1 L7.2 U4.C2 | length 258.8
  Top w3.63: L7.2@149.61,581.69 151.57,581.69 168.16,565.11 168.16,563.14 C62.1@172.3,559 ; C62.1@173.23,560.04 212.4,560.04 221.14,568.78 221.14,576.62 235.07,590.55 A1.1@236.22,590.55 249.77,577 U4.C2@375.94,577
CLKOUTP: pad.7 U1.153 | length 150.3
  Top w4: v1@147.86,250.97 154.74,244.1 U1.153@177.95,244.1
  Bottom w4: v1(147.34,252.02) 172.56,252.02 189.81,269.27 189.81,300.91 pad.7@215.33,326.43
DDR_1V8: C11.1 R1.2 | length 49.9
  Top w8: C11.1@-39.74,-286.79 -39.28,-287.24 -39.28,-312.71 v1(-39.19,-312.8) ; C11.1@-39.37,-286.42 R1.2@-15.75,-286.42
DDR_A0: U1.80 U2.M8 | length 924.7
  Top w3.63: v1(-222.69,-124.86) -222.69,-123.83 -213.83,-114.96 U1.80@-200.79,-114.96 ; v1(-221.64,-621.72) -204.71,-621.72 -199.61,-626.82 -189.33,-626.82 -182.41,-619.89 -182.41,-608.79 -183.11,-608.09 -183.11,-584.68 -170,-571.57 U2.M8@-170,-571
  Inner3 w3.1: v1(-222.69,-124.86) -223.2,-125.36 -223.2,-135.51 -236.23,-148.54 -236.23,-174.12 -236.23,-180.19 -232.96,-183.47 -225.93,-183.47 -222.65,-186.74 -222.65,-193.29 -225.93,-196.57 -247.56,-196.57 -250.83,-199.84 -250.83,-206.39 -247.56,-209.67 -239.21,-209.67 -235.93,-212.94 -235.93,-219.5 -239.21,-222.77 -244.73,-222.77 -248,-226.05 -248,-232.6 -244.73,-235.87 -239.51,-235.87 -236.23,-239.15 -236.23,-240.7 -236.23,-245.79 -247.8,-257.36 -247.8,-311.95 -245.19,-314.57 -245.19,-322.74 -245.18,-324.3 -245.18,-350.57 -248.45,-353.84 -251.9,-353.84 -255.18,-357.12 -255.18,-363.67 -251.9,-366.94 -248.45,-366.94 -245.18,-370.22 -245.18,-371.77 -245.18,-382.79 -254,-391.61 -254,-393.27 -264,-403.27 -264,-489.36 -264,-495.09 -260.72,-498.36 -251.68,-498.36 -248.41,-501.64 -248.41,-508.19 -251.68,-511.46 -270.72,-511.46 -274,-514.74 -274,-521.29 -270.72,-524.56 -251.29,-524.56 -248.01,-527.84 -248.01,-534.39 -251.29,-537.67 -270.72,-537.67 -274,-540.94 -274,-547.49 -270.72,-550.77 -251.29,-550.77 -248.01,-554.04 -248.01,-560.59 -251.29,-563.87 -270.72,-563.87 -274,-567.14 -274,-573.7 -270.72,-576.97 -251.29,-576.97 -248.01,-580.25 -248.01,-586.8 -251.29,-590.07 -270.72,-590.07 -274,-593.35 -274,-599.9 -270.72,-603.17 -267.28,-603.17 -264,-606.45 -264,-608 -264,-611.92 -253.92,-622 -221.93,-622 v1(-221.64,-621.72)
DDR_A1: U1.88 U2.M3 | length 914
  Top w3.63: v1(-178.89,-461.88) -170.15,-453.14 -170.15,-415.15 U2.M3@-169,-414 ; v1(-168,50) -154.93,36.93 -154.93,-29.27 -143.15,-41.06 -143.15,-49.12 -132.05,-60.21 -132.05,-87.86 -122.44,-97.46 -122.44,-114.56 U1.88@-122.05,-114.96
  Inner3 w3.1: v1(-178.89,-461.88) -180.43,-460.35 -180.43,-448.9 -180.43,-401.71 -183.71,-398.43 -189.71,-398.43 -192.99,-395.16 -192.99,-388.61 -189.71,-385.33 -183.71,-385.33 -180.43,-382.06 -180.43,-375.5 -183.71,-372.23 -189.71,-372.23 -192.99,-368.95 -192.99,-362.4 -189.71,-359.13 -183.71,-359.13 -180.43,-355.85 -180.43,-355 -181,-354.43 -181,-341.2 -185.2,-337 -185.2,-317.68 -183.27,-315.75 -183.27,-306.19 -185.2,-304.26 -185.2,-275.94 -166.06,-256.8 -166.06,-224.9 -181.74,-209.22 -181.74,-195.26 -186,-191 -186,-176.35 -182.72,-173.07 -180.87,-173.07 -177.6,-169.8 -177.6,-163.25 -180.87,-159.97 -189.64,-159.97 -192.91,-156.7 -192.91,-150.14 -189.64,-146.87 -180.88,-146.87 -177.61,-143.59 -177.61,-137.04 -180.88,-133.77 -189.64,-133.77 -192.91,-130.49 -192.91,-123.94 -189.64,-120.67 -180.88,-120.67 -177.61,-117.39 -177.61,-110.84 -180.88,-107.56 -189.64,-107.56 -192.91,-104.29 -192.91,-97.74 -189.64,-94.46 -189.28,-94.46 -186,-91.19 -186,-67.17 -186,-43.83 -175.19,-33.01 -169.79,-33.01 -159.84,-23.07 -159.84,-2.19 -159.84,-0.64 -163.12,2.64 -166.57,2.64 -169.84,5.91 -169.84,12.46 -166.57,15.74 -153.12,15.74 -149.84,19.01 -149.84,25.57 -153.12,28.84 -156.57,28.84 -159.84,32.12 -159.84,34.93 -159.84,41.84 v1(-168,50)
DDR_A2: U1.87 U2.M7 | length 907.1
  Top w3.63: U2.M7@-165.25,-538.25 -165.25,-543.41 -154.57,-554.09 -154.57,-594.56 v1(-142.2,-606.93) ; v1(-142.93,-180.51) -131.89,-169.47 U1.87@-131.89,-149.6
  Inner3 w3.1: v1(-142.93,-180.51) -144.63,-182.21 -144.63,-186.65 -144.75,-186.78 -144.75,-243.46 -144.75,-272.91 -141.48,-276.18 -129.56,-276.18 -126.28,-279.46 -126.28,-286.01 -129.56,-289.28 -144.26,-289.28 -147.53,-292.56 -147.53,-299.11 -144.26,-302.38 -126.6,-302.38 -123.32,-305.66 -123.32,-312.21 -126.6,-315.48 -144.26,-315.48 -147.53,-318.76 -147.53,-325.31 -144.26,-328.59 -142.6,-328.59 -139.32,-331.86 -139.32,-338.41 -142.6,-341.69 -144.26,-341.69 -147.53,-344.96 -147.53,-351.51 -144.26,-354.79 -126.6,-354.79 -123.32,-358.06 -123.32,-364.62 -126.6,-367.89 -144.26,-367.89 -147.53,-371.17 -147.53,-377.72 -144.26,-380.99 -126.6,-380.99 -123.32,-384.27 -123.32,-390.82 -126.6,-394.09 -144.26,-394.09 -147.53,-397.37 -147.53,-403.92 -144.26,-407.2 -134.41,-407.2 -131.13,-410.47 -131.13,-417.02 -134.41,-420.3 -139.99,-420.3 -143.26,-423.57 -143.26,-428.2 -136.52,-434.95 -130.27,-441.2 -130.27,-444.26 -125.29,-449.24 -125.29,-458.8 -131.49,-465 -133,-465 -141,-473 -141,-475.61 -141,-478.38 -144.28,-481.66 -147.72,-481.66 -151,-484.93 -151,-491.48 -147.72,-494.76 -124.17,-494.76 -120.9,-498.03 -120.9,-504.58 -124.17,-507.86 -147.72,-507.86 -151,-511.14 -151,-517.69 -147.72,-520.96 -124.17,-520.96 -120.9,-524.24 -120.9,-530.79 -124.17,-534.06 -147.72,-534.06 -151,-537.34 -151,-543.89 -147.72,-547.16 -124.17,-547.16 -120.9,-550.44 -120.9,-556.99 -124.17,-560.27 -147.72,-560.27 -151,-563.54 -151,-570.09 -147.72,-573.37 -144.28,-573.37 -141,-576.64 -141,-604 v1@-140.6,-604.4
DDR_A3: U1.97 U2.N2 | length 883.4
  Top w3.63: U2.N2@-200.79,-381.89 -183.11,-399.57 -183.11,-419.11 -178,-424.22 -178,-433.53 -187.56,-443.09 -216.84,-443.09 -223.19,-449.44 -223.19,-472.99 -217.37,-478.81 v1(-196.1,-478.81) ; v1(-41.96,-172.9) -40.36,-171.3 -36.1,-171.3 -33.46,-168.66 U1.97@-33.46,-149.6
  Inner3 w3.1: v1(-41.96,-172.9) -41.96,-185.25 -27.64,-199.56 -27.64,-203.74 -27.64,-222.43 -30.92,-225.71 -41.51,-225.71 -44.78,-228.98 -44.78,-235.53 -41.51,-238.81 -30.92,-238.81 -27.64,-242.08 -27.64,-248.63 -30.92,-251.91 -41.51,-251.91 -44.78,-255.18 -44.78,-261.74 -41.51,-265.01 -30.92,-265.01 -27.64,-268.29 -27.64,-274.84 -30.92,-278.11 -35.03,-278.11 -38.31,-281.39 -38.31,-287.94 -35.03,-291.21 -30.92,-291.21 -27.64,-294.49 -27.64,-296.04 -27.64,-318.52 -27.64,-323.76 -30.92,-327.04 -41.51,-327.04 -44.78,-330.31 -44.78,-336.86 -41.51,-340.14 -30.92,-340.14 -27.64,-343.41 -27.64,-344.96 -27.64,-350.81 -37.97,-361.13 -37.97,-373.1 -37.28,-373.79 -22.45,-388.63 -22.45,-422.93 -25.72,-426.21 -41.34,-426.21 -44.61,-429.48 -44.61,-436.04 -41.34,-439.31 -28.32,-439.31 -25.04,-442.59 -25.04,-444.14 -25.04,-464.23 -32.37,-471.56 -33.29,-471.56 -34.03,-472.29 -37.14,-475.4 v1(-39.55,-475.4)
  Inner4 w3.09: v1(-196.1,-478.81) -179.35,-478.81 -164.55,-464 -164.55,-456.41 -149.59,-441.46 -133.08,-441.46 -119.97,-454.57 -119.97,-468.03 -115.46,-472.54 -109.91,-472.54 -108.37,-472.54 -105.1,-469.27 -105.1,-461.32 -101.83,-458.05 -95.28,-458.05 -92.01,-461.32 -92.01,-469.27 -88.74,-472.54 -82.2,-472.54 -78.92,-469.27 -78.92,-465.06 -75.65,-461.79 -69.11,-461.79 -65.84,-465.06 -65.84,-469.27 -62.57,-472.54 -55.96,-472.54 -51.72,-472.54 -50.18,-474.09 -40.86,-474.09 v1(-39.55,-475.4)